# EAGLE board PEGMARev0 (EAGLE 6.2), part 1 of 3
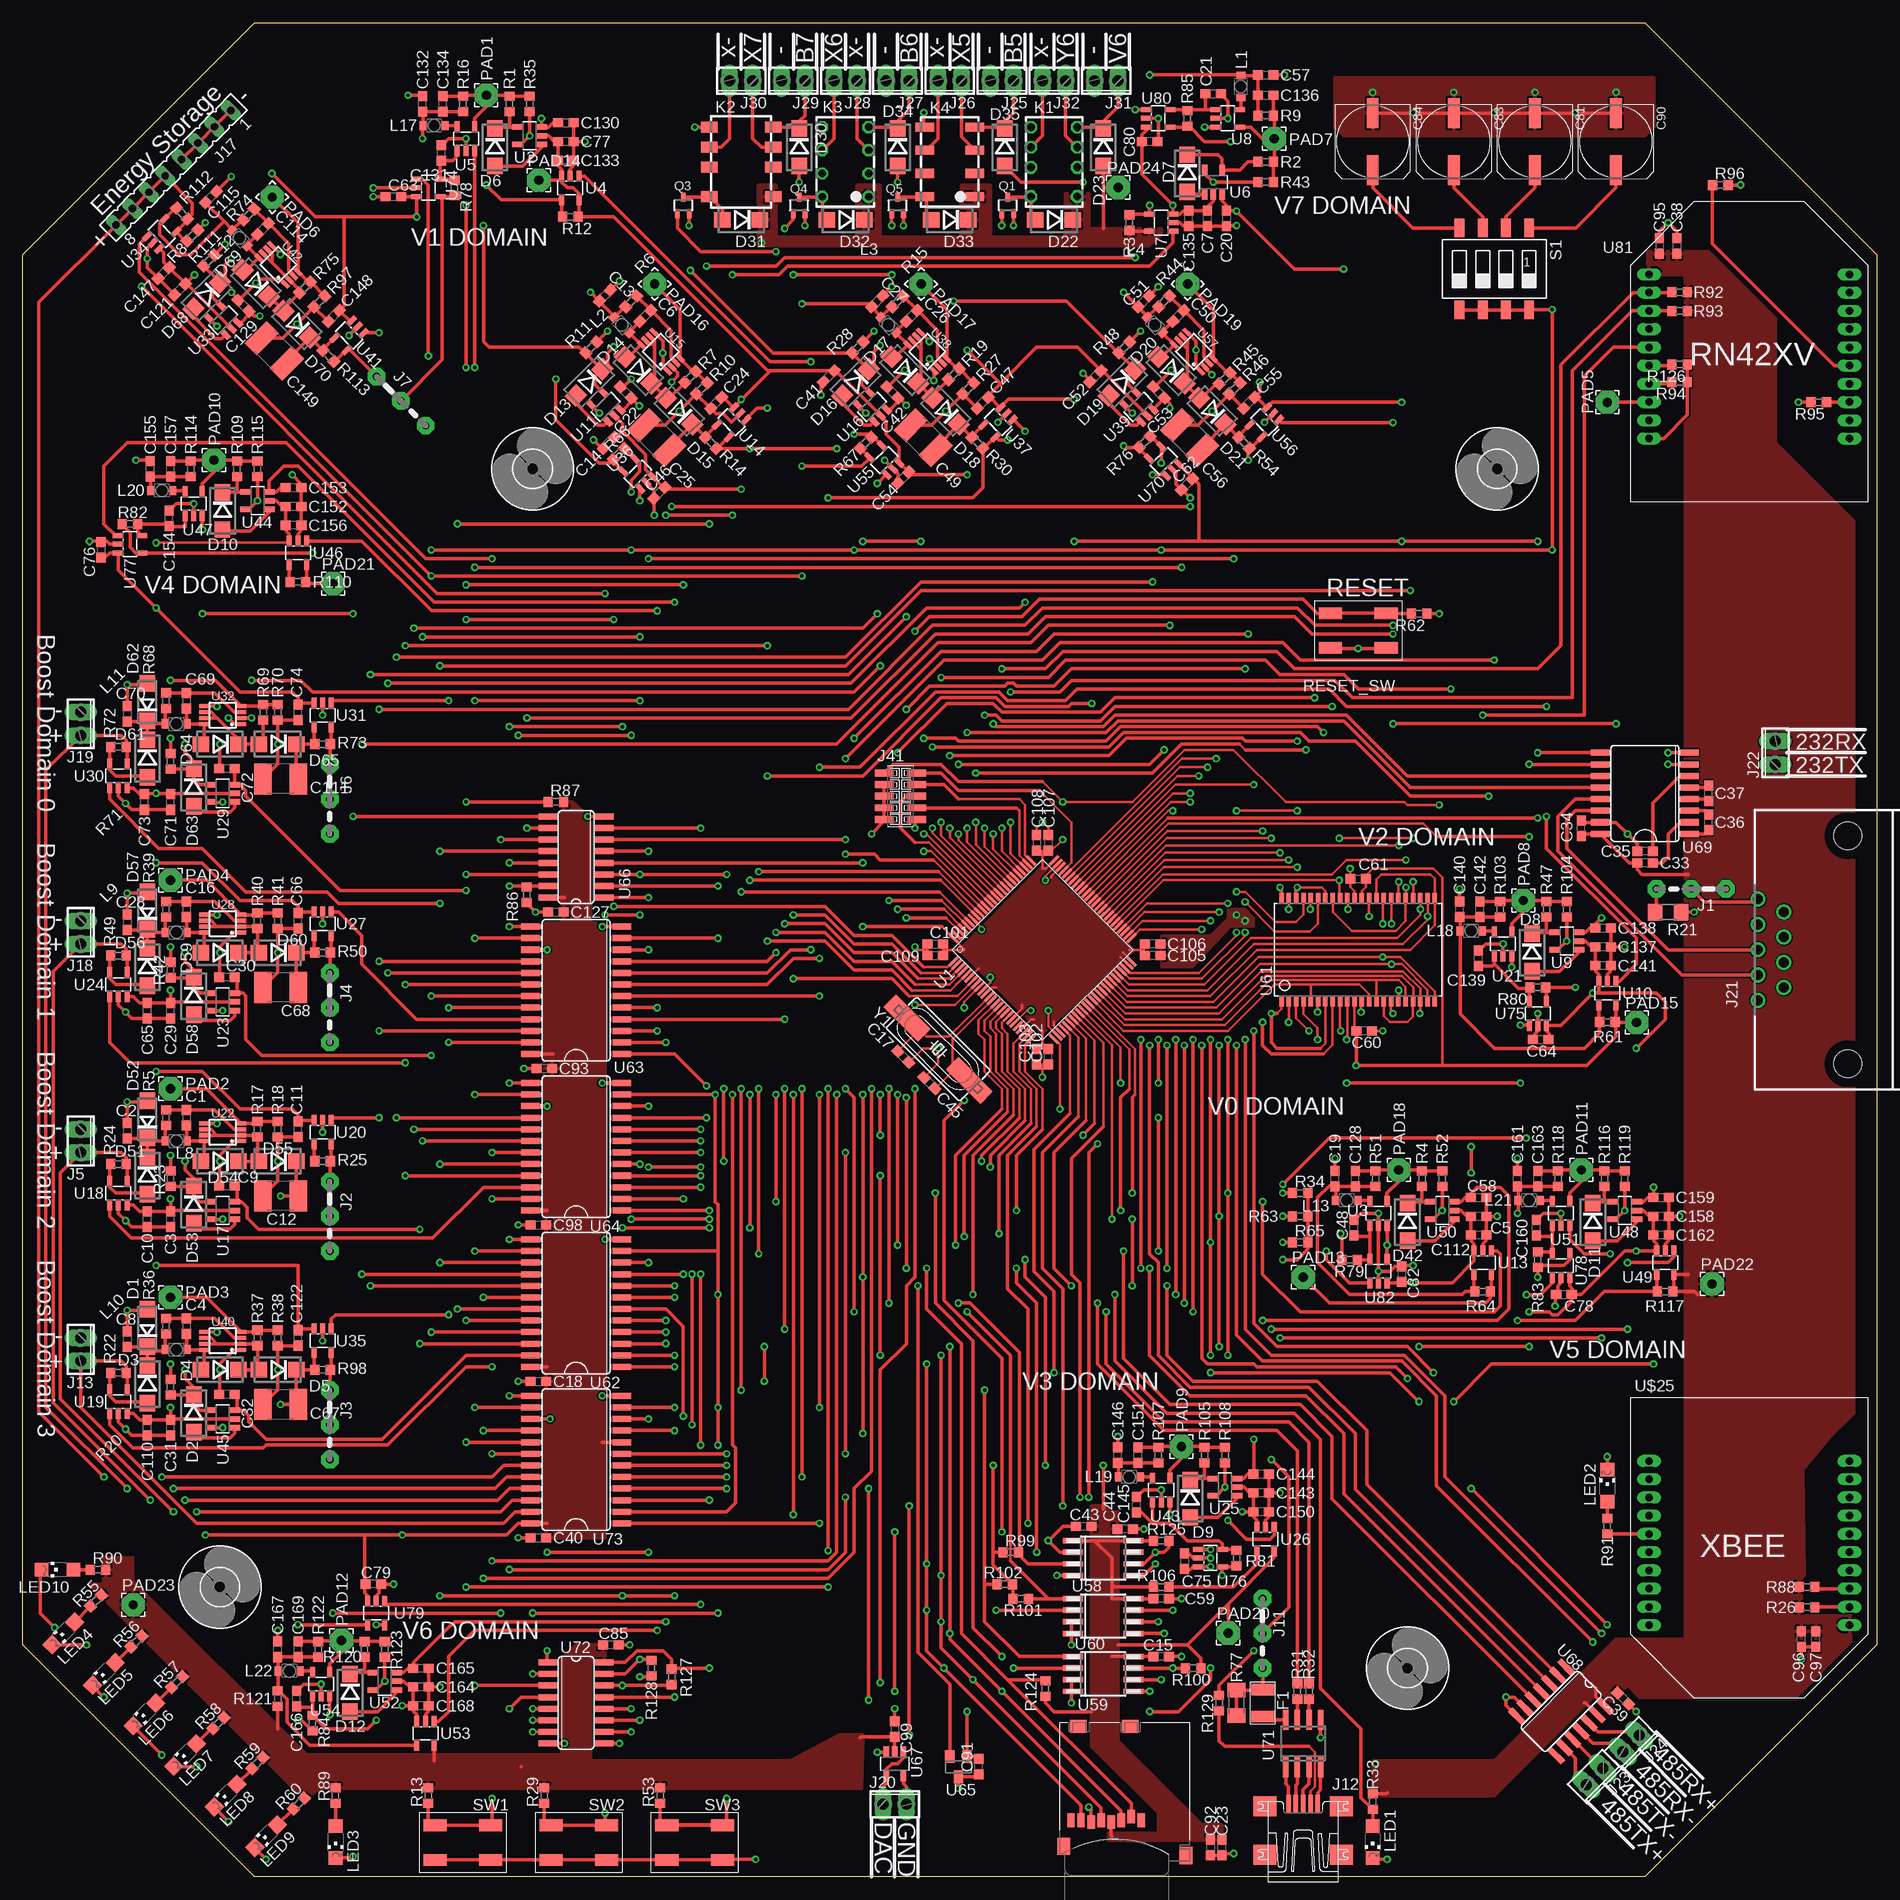
[diagram p0: board, top side]
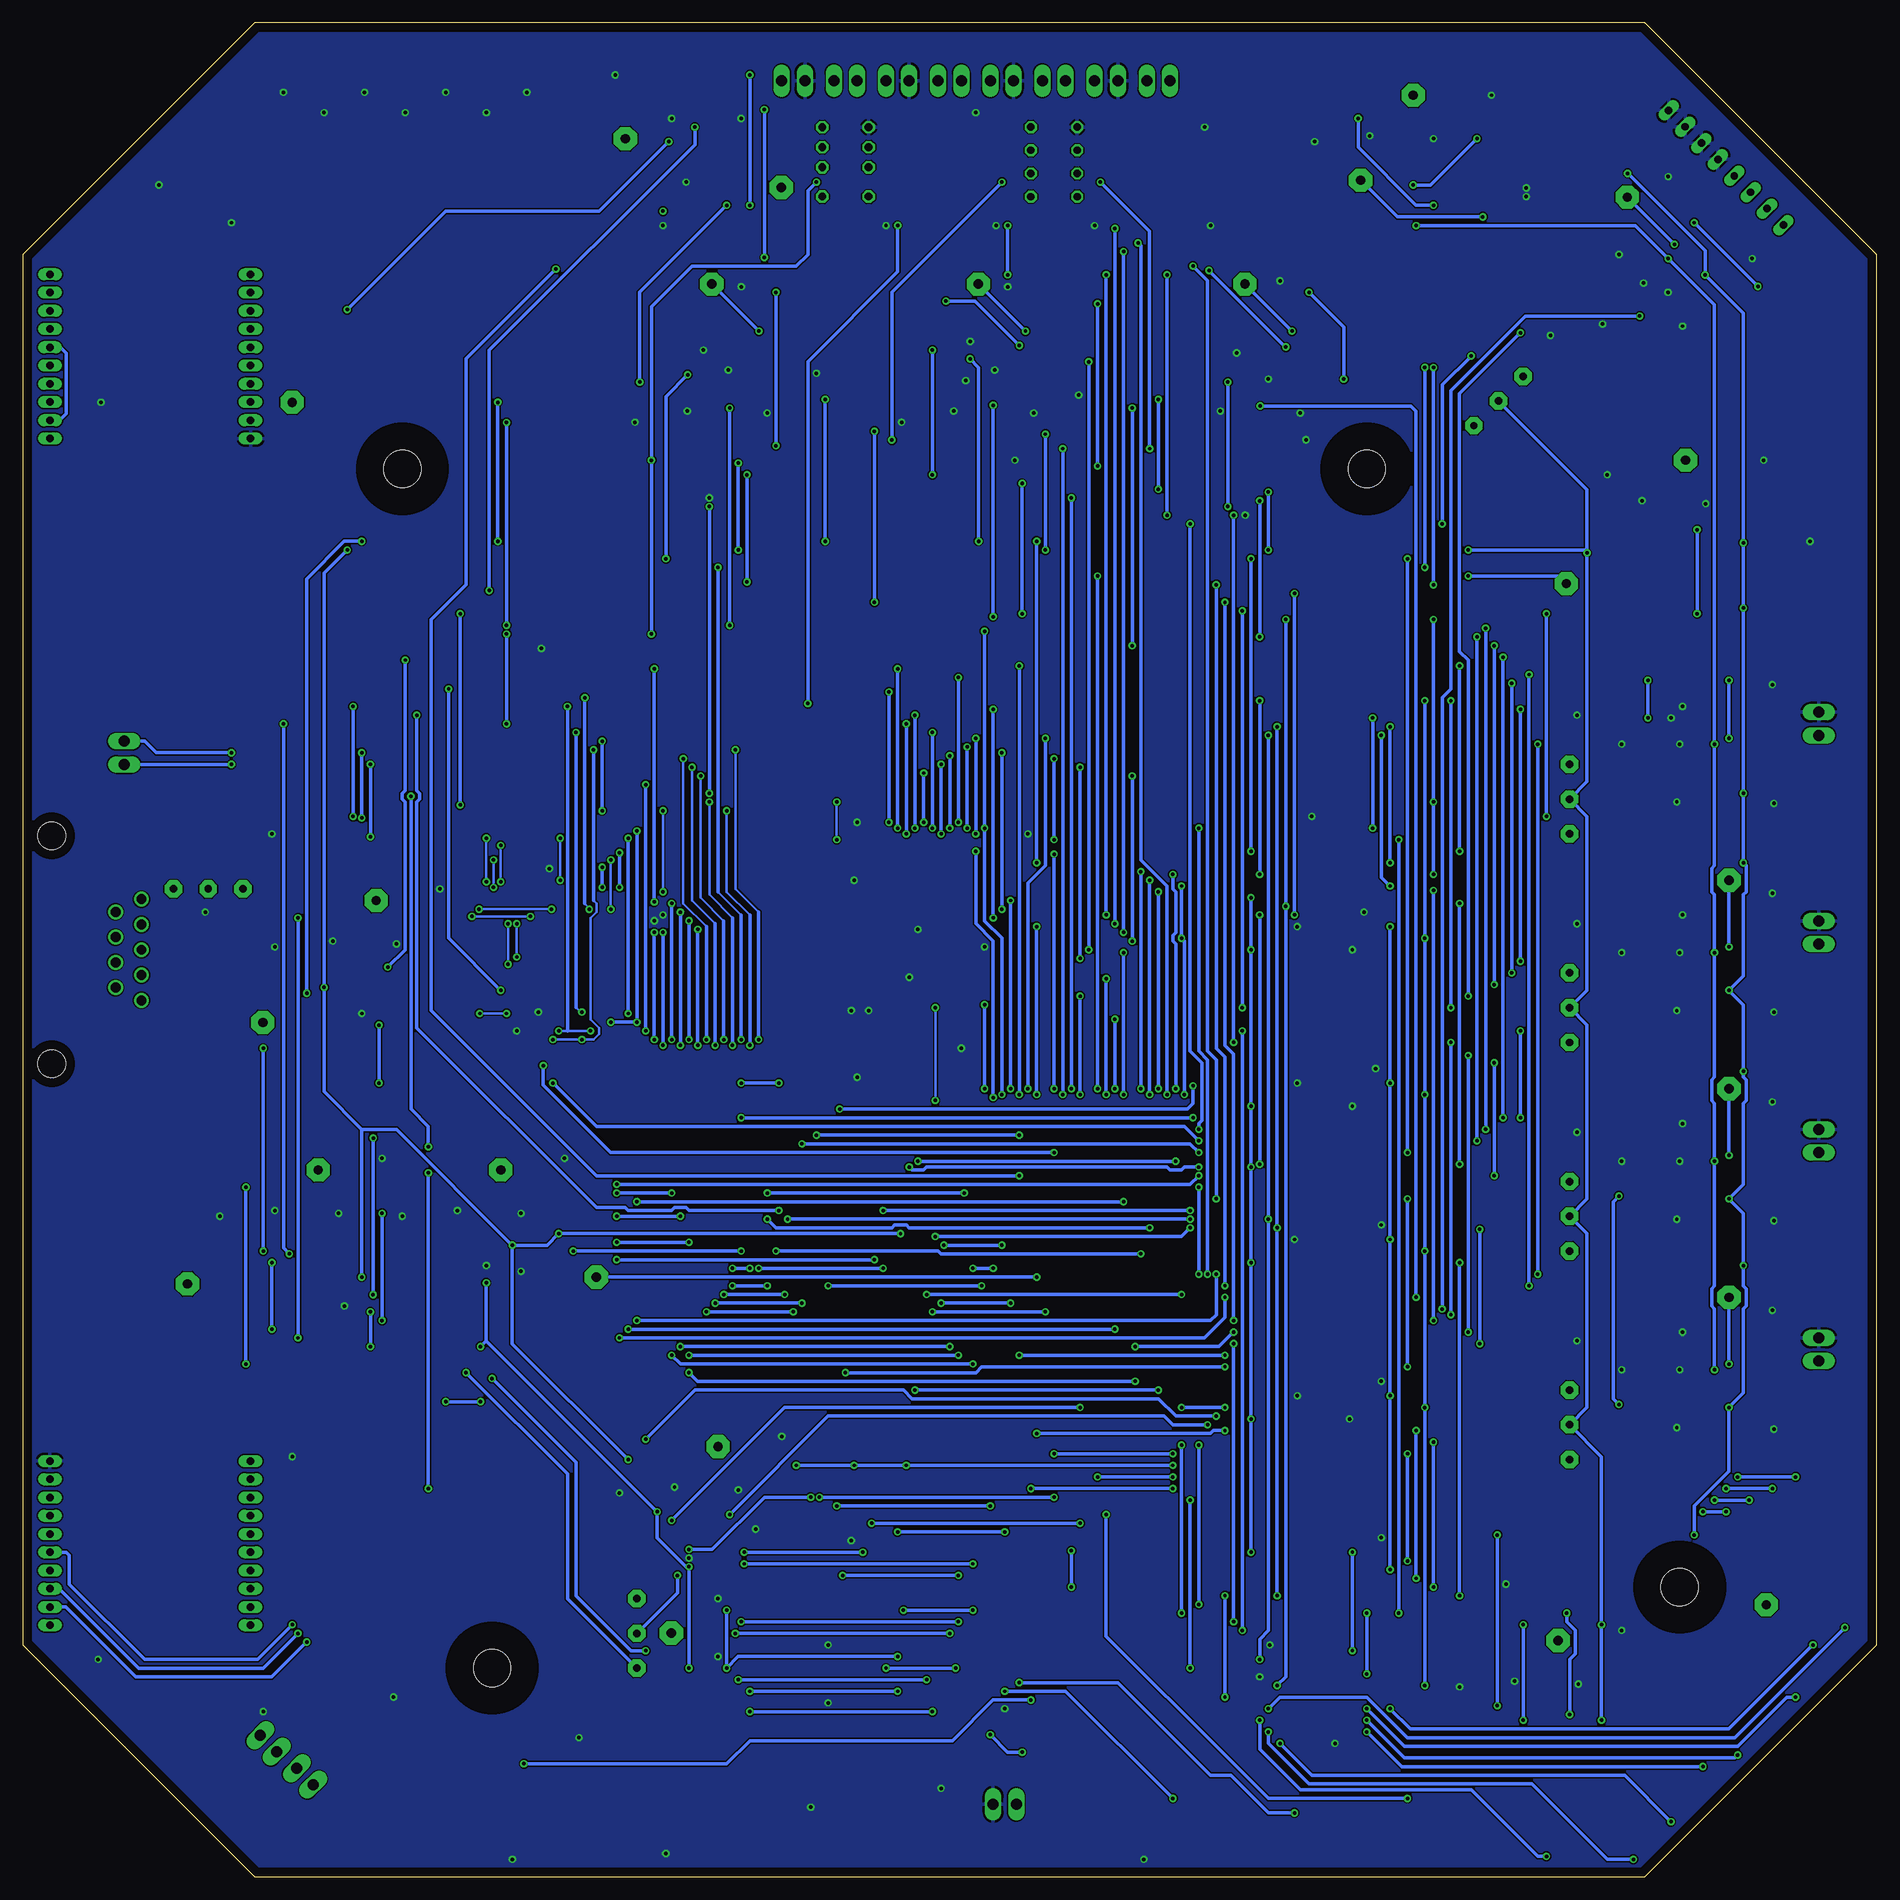
[diagram p1: board, bottom side, seen from below]

Size 203.2 x 203.2 mm. Coordinates in mm from the lower left corner, seen from the top.
Outline: 25.4,0 0,25.4 0,177.8 25.4,203.2 177.8,203.2 203.2,177.8 203.2,25.4 177.8,0 25.4,0
Copper layers (1*16): Top 0.035mm / dielectric 1.5mm / Bottom 0.035mm
Design rules: minimum track width 10mil, minimum drill 15mil, track to track 6mil, track to pad 6mil, pad to pad 6mil, via to via 6mil, smd to smd 6mil, copper to edge 40mil, drill to drill 8mil, minimum pad ring 10mil, minimum via ring 8mil, stop-mask expansion 4mil, vias tented up to drill 0mil, thermal gap 10mil

## Footprints (pad centres in the part's own frame; a part is rotated, then mirrored left to right if it is on the bottom)
C0603 = smd 1.1 x 1: 1 -0.85,0; 2 0.85,0
C1812 = smd 1.9 x 3.4: 1 -1.95,0; 2 1.95,0
UD-8X10_NICHICON = smd 3.3 x 1.3: + 3.125,0; - -3.125,0
DO214AC = smd 1.8 x 1.7: A 2.05,0; C -2.05,0
DO214BA = smd 1.8 x 1.7: A 2.05,0; C -2.05,0
FUSE(1210) = smd 1.27 x 2.54: P$1 -1.483,0.03; P$2 1.517,0.03
04C = drill 0.813 pad 1.905 octagon: 1 -1.905,0; 2 1.905,0; 3 5.715,0
2POL254 = drill 1.2 long: 1 -1.27,0; 2 1.27,0
UX60A-MB-5ST = smd 2 x 0.5: 1 2.25,1.6; 2 2.25,0.8; 3 2.25,0; 4 2.25,-0.8; 5 2.25,-1.6 | smd 2.2 x 2.5: M1 -3.3,-4.2; M2 -3.3,4.2; M3 2,4.2; M4 2,-4.2
FE08 = drill 0.813 long: 1 -8.89,0; 2 -6.35,0; 3 -3.81,0; 4 -1.27,0; 5 1.27,0; 6 3.81,0; 7 6.35,0; 8 8.89,0
H2M09RA = drill 1.092: 1 -5.537,7.925; 2 -2.769,7.925; 3 0,7.925; 4 2.769,7.925; 5 5.537,7.925; 6 -4.153,5.08; 7 -1.384,5.08; 8 1.384,5.08; 9 4.153,5.08 | hole 3.048: -12.497,-1.905; 12.497,-1.905
1296-10 = smd 0.76 x 2.05: 1 -2.54,-1.78; 2 -2.54,1.78; 3 -1.27,-1.78; 4 -1.27,1.78; 5 0,-1.78; 6 0,1.78; 7 1.27,-1.78; 8 1.27,1.78; 9 2.54,-1.78; 10 2.54,1.78
G6KU-2P-Y = drill 0.85 octagon: 1 -3.8,-2.54; 2 -0.6,-2.54; 3 1.6,-2.54; 4 3.8,-2.54; 5 3.8,2.54; 6 1.6,2.54; 7 -0.6,2.54; 8 -3.8,2.54
G6KU-2F-Y = smd 1.2 x 1.8: 1 -3.8,-3.5; 2 -0.6,-3.5; 3 1.6,-3.5; 4 3.8,-3.5; 5 3.8,3.5; 6 1.6,3.5; 7 -0.6,3.5; 8 -3.8,3.5
G6K-2P = drill 0.8 octagon: 1 -2.54,-2.54; 2 0,-2.54; 3 2.54,-2.54; 4 5.08,-2.54; 5 5.08,2.54; 6 2.54,2.54; 7 0,2.54; 8 -2.54,2.54
G6K-2G = smd 1 x 2: 1 -3.81,-2.75; 2 -1.27,-2.75; 3 1.27,-2.75; 4 3.81,-2.75; 5 3.81,2.75; 6 1.27,2.75; 7 -1.27,2.75; 8 -3.81,2.75
L1008/2520METRIC = smd 0.8 x 1: 1 -1.2,0; 2 1.2,0
CHIPLED_1206 = smd 1.5 x 1.5: A 0,-1.75; C 0,1.75
2,54/1,0 = drill 1.016 pad 2.54 octagon: 1 0,0
SOT323 = smd 0.5 x 1: 1 0,0.9; 2 -0.65,-0.9; 3 0.65,-0.9
R0603 = smd 1 x 1.1: 1 -0.85,0; 2 0.85,0
R1206 = smd 1.6 x 1.803: 1 -1.422,0; 2 1.422,0
M1206 = smd 1.6 x 2: 1 -1.4,0; 2 1.4,0
SWITCH(B3SN) = smd 2.54 x 1.27: 1 -3.071,-1.97; 2 3.029,-1.97; 3 3.029,1.83; 4 -3.071,1.83
SMS-004 = smd 1.092 x 2.007: 1 -3.81,-4.496; 2 -1.27,-4.496; 3 1.27,-4.496; 4 3.81,-4.496; 5 3.81,4.496; 6 1.27,4.496; 7 -1.27,4.496; 8 -3.81,4.496
PZ100 = smd 1.4 x 0.3: 1 -7.8,6; 2 -7.8,5.5; 3 -7.8,5; 4 -7.8,4.5; 5 -7.8,4; 6 -7.8,3.5; 7 -7.8,3; 8 -7.8,2.5; 9 -7.8,2; 10 -7.8,1.5; 11 -7.8,1; 12 -7.8,0.5; 13 -7.8,0; 14 -7.8,-0.5; 15 -7.8,-1; 16 -7.8,-1.5; 17 -7.8,-2; 18 -7.8,-2.5; 19 -7.8,-3; 20 -7.8,-3.5; 21 -7.8,-4; 22 -7.8,-4.5; 23 -7.8,-5; 24 -7.8,-5.5; 25 -7.8,-6; 51 7.8,-6; 52 7.8,-5.5; 53 7.8,-5; 54 7.8,-4.5; 55 7.8,-4; 56 7.8,-3.5; 57 7.8,-3; 58 7.8,-2.5; 59 7.8,-2; 60 7.8,-1.5; 61 7.8,-1; 62 7.8,-0.5; 63 7.8,0; 64 7.8,0.5; 65 7.8,1; 66 7.8,1.5; 67 7.8,2; 68 7.8,2.5; 69 7.8,3; 70 7.8,3.5; 71 7.8,4; 72 7.8,4.5; 73 7.8,5; 74 7.8,5.5; 75 7.8,6 | smd 0.3 x 1.4: 26 -6,-7.8; 27 -5.5,-7.8; 28 -5,-7.8; 29 -4.5,-7.8; 30 -4,-7.8; 31 -3.5,-7.8; 32 -3,-7.8; 33 -2.5,-7.8; 34 -2,-7.8; 35 -1.5,-7.8; 36 -1,-7.8; 37 -0.5,-7.8; 38 0,-7.8; 39 0.5,-7.8; 40 1,-7.8; 41 1.5,-7.8; 42 2,-7.8; 43 2.5,-7.8; 44 3,-7.8; 45 3.5,-7.8; 46 4,-7.8; 47 4.5,-7.8; 48 5,-7.8; 49 5.5,-7.8; 50 6,-7.8; 76 6,7.8; 77 5.5,7.8; 78 5,7.8; 79 4.5,7.8; 80 4,7.8; 81 3.5,7.8; 82 3,7.8; 83 2.5,7.8; 84 2,7.8; 85 1.5,7.8; 86 1,7.8; 87 0.5,7.8; 88 0,7.8; 89 -0.5,7.8; 90 -1,7.8; 91 -1.5,7.8; 92 -2,7.8; 93 -2.5,7.8; 94 -3,7.8; 95 -3.5,7.8; 96 -4,7.8; 97 -4.5,7.8; 98 -5,7.8; 99 -5.5,7.8; 100 -6,7.8
SOT23-5 = smd 0.6 x 1.2: 1 -0.95,-1.306; 2 0,-1.306; 3 0.95,-1.306; 4 0.95,1.306; 5 -0.95,1.306
SOT23-5' = smd 0.55 x 1.2: 1 -0.95,-1.3; 2 0,-1.3; 3 0.95,-1.3; 4 0.95,1.3; 5 -0.95,1.3
MICROSD = smd 0.8 x 1.5: 1 -1.94,2.7; 2 -0.84,2.3; 3 0.26,2.7; 4 1.36,2.9; 5 2.46,2.7; 6 3.56,2.9; 7 4.66,2.7; 8 5.76,2.7 | smd 1.4 x 1.9: NC -6.85,6.55; NC3 6.55,5.55 | smd 1.8 x 1.4: NC1 -0.75,-7.6; NC2 4.95,-7.6
MSOP8 = smd 0.45 x 1: 1 -0.975,-2.05; 2 -0.325,-2.05; 3 0.325,-2.05; 4 0.975,-2.05; 5 0.975,2.05; 6 0.325,2.05; 7 -0.325,2.05; 8 -0.975,2.05
SO-08M = smd 0.6 x 2.2: 1 -1.905,-3.33; 2 -0.635,-3.33; 3 0.635,-3.33; 4 1.905,-3.33; 5 1.905,3.33; 6 0.635,3.33; 7 -0.635,3.33; 8 -1.905,3.33
TSOPII-Z44 = smd 0.5 x 1.2: 1 -8.4,-5.627; 2 -7.6,-5.627; 3 -6.8,-5.627; 4 -6,-5.627; 5 -5.2,-5.627; 6 -4.4,-5.627; 7 -3.6,-5.627; 8 -2.8,-5.627; 9 -2,-5.627; 10 -1.2,-5.627; 11 -0.4,-5.627; 12 0.4,-5.627; 13 1.2,-5.627; 14 2,-5.627; 15 2.8,-5.627; 16 3.6,-5.627; 17 4.4,-5.627; 18 5.2,-5.627; 19 6,-5.627; 20 6.8,-5.627; 21 7.6,-5.627; 22 8.4,-5.627; 23 8.4,5.627; 24 7.6,5.627; 25 6.8,5.627; 26 6,5.627; 27 5.2,5.627; 28 4.4,5.627; 29 3.6,5.627; 30 2.8,5.627; 31 2,5.627; 32 1.2,5.627; 33 0.4,5.627; 34 -0.4,5.627; 35 -1.2,5.627; 36 -2,5.627; 37 -2.8,5.627; 38 -3.6,5.627; 39 -4.4,5.627; 40 -5.2,5.627; 41 -6,5.627; 42 -6.8,5.627; 43 -7.6,5.627; 44 -8.4,5.627
SO24W = smd 0.66 x 2.032: 1 -6.985,-5.029; 2 -5.715,-5.029; 3 -4.445,-5.029; 4 -3.175,-5.029; 5 -1.905,-5.029; 6 -0.635,-5.029; 7 0.635,-5.029; 8 1.905,-5.029; 9 3.175,-5.029; 10 4.445,-5.029; 11 5.715,-5.029; 12 6.985,-5.029; 13 6.985,5.029; 14 5.715,5.029; 15 4.445,5.029; 16 3.175,5.029; 17 1.905,5.029; 18 0.635,5.029; 19 -0.635,5.029; 20 -1.905,5.029; 21 -3.175,5.029; 22 -4.445,5.029; 23 -5.715,5.029; 24 -6.985,5.029
SOT23 = smd 1 x 1.4: 1 -0.95,-1.1; 2 0.95,-1.1; 3 0,1.1
SO16 = smd 0.66 x 2.032: 1 -4.445,-3.073; 2 -3.175,-3.073; 3 -1.905,-3.073; 4 -0.635,-3.073; 5 0.635,-3.073; 6 1.905,-3.073; 7 3.175,-3.073; 8 4.445,-3.073; 9 4.445,3.073; 10 3.175,3.073; 11 1.905,3.073; 12 0.635,3.073; 13 -0.635,3.073; 14 -1.905,3.073; 15 -3.175,3.073; 16 -4.445,3.073
SO14 = smd 0.66 x 2.032: 1 -3.81,-3.073; 2 -2.54,-3.073; 3 -1.27,-3.073; 4 0,-3.073; 5 1.27,-3.073; 6 2.54,-3.073; 7 3.81,-3.073; 8 3.81,3.073; 9 2.54,3.073; 10 1.27,3.073; 11 0,3.073; 12 -1.27,3.073; 13 -2.54,3.073; 14 -3.81,3.073
SO16L = smd 0.66 x 2.032: 1 -4.445,-4.902; 2 -3.175,-4.902; 3 -1.905,-4.902; 4 -0.635,-4.902; 5 0.635,-4.902; 6 1.905,-4.902; 7 3.175,-4.902; 8 4.445,-4.902; 9 4.445,4.902; 10 3.175,4.902; 11 1.905,4.902; 12 0.635,4.902; 13 -0.635,4.902; 14 -1.905,4.902; 15 -3.175,4.902; 16 -4.445,4.902
SO08 = smd 0.6 x 2.2: 1 -1.905,-2.6; 2 -0.635,-2.6; 3 0.635,-2.6; 4 1.905,-2.6; 5 1.905,2.6; 6 0.635,2.6; 7 -0.635,2.6; 8 -1.905,2.6
RN42XV = drill 0.813 long: 1 -11,9.27; 2 -11,7.27; 3 -11,5.27; 4 -11,3.27; 5 -11,1.27; 6 -11,-0.73; 7 -11,-2.73; 8 -11,-4.73; 9 -11,-6.73; 10 -11,-8.73; 11 11,-8.73; 12 11,-6.73; 13 11,-4.73; 14 11,-2.73; 15 11,-0.73; 16 11,1.27; 17 11,3.27; 18 11,5.27; 19 11,7.27; 20 11,9.27
4,1 = hole 4.1: 0,0
XBEE = drill 0.813 long: 1 -11,8; 2 -11,6; 3 -11,4; 4 -11,2; 5 -11,0; 6 -11,-2; 7 -11,-4; 8 -11,-6; 9 -11,-8; 10 -11,-10; 11 11,-10; 12 11,-8; 13 11,-6; 14 11,-4; 15 11,-2; 16 11,0; 17 11,2; 18 11,4; 19 11,6; 20 11,8
HC49UP = smd 5.334 x 1.93: 1 -4.826,0; 2 4.826,0

## Placement (x,y rotation side)
C1  4.7pF  [C0603]  17.94,83.19 270 top
C2  22uF  [C0603]  11.43,81.76 270 top
C3  .1uF  [C0603]  16.19,72.07 90 top
C4  4.7pF  [C0603]  17.94,60.33 270 top
C5  .1uF  [C0603]  159.54,72.39 180 top
C6  4.7pF  [C0603]  68.24,171.09 225 top
C7  .1uF  [C0603]  129.86,181.77 90 top
C8  22uF  [C0603]  11.43,58.9 270 top
C9  10uF  [C0603]  22.38,75.72 180 top
C10  .1uF  [C0603]  13.65,72.07 90 top
C11  .1uF  [C0603]  30.16,81.92 90 top
C12  100uF Tantalum  [C1812]  28.26,74.61 180 top
C13  22uF  [C0603]  63.79,173.3 225 top
C14  .1uF  [C0603]  64.23,157.16 45 top
C15  .1uF  [C0603]  124.78,24.13 180 top
C16  4.7pF  [C0603]  17.94,106.05 270 top
C17  16pF  [C0603]  96.52,89.85 135 top
C18  .1uF  [C0603]  56.52,54.29 0 top
C19  10uF  [C0603]  143.83,76.52 90 top
C20  10uF  [C0603]  131.92,181.77 270 top
C21  4.7uF  [C0603]  130.49,195.42 0 top
C22  10uF  [C0603]  66.11,162.67 135 top
C23  10uF  [C0603]  131.44,3.17 90 top
C24  .1uF  [C0603]  75.99,161.55 45 top
C25  100uF Tantalum  [C1812]  69.48,157.73 135 top
C26  4.7pF  [C0603]  97.45,171.09 225 top
C27  22uF  [C0603]  93.63,172.66 225 top
C28  22uF  [C0603]  11.43,104.62 270 top
C29  .1uF  [C0603]  16.19,94.93 90 top
C30  10uF  [C0603]  22.38,98.58 180 top
C31  .1uF  [C0603]  16.19,49.21 90 top
C32  10uF  [C0603]  22.38,52.86 180 top
C33  .1uF  [C0603]  177.8,111.12 180 top
C34  .1uF  [C0603]  170.81,114.94 90 top
C35  .1uF  [C0603]  177.8,112.39 180 top
C36  .1uF  [C0603]  184.78,115.57 90 top
C37  .1uF  [C0603]  184.78,118.75 90 top
C38  .1uF  [C0603]  181.29,178.75 270 top
C39  .1uF  [C0603]  175.42,19.53 315 top
C40  .1uF  [C0603]  56.52,37.15 0 top
C41  .1uF  [C0603]  88.36,164.47 45 top
C42  10uF  [C0603]  95.32,162.67 135 top
C43  .22uF  [C0603]  116.28,38.42 0 top
C44  .1uF  [C0603]  120.81,38.1 180 top
C45  16pF  [C0603]  99.38,87 135 top
C46  .1uF  [C0603]  69.76,151.67 45 top
C47  .1uF  [C0603]  105.2,161.55 45 top
C48  4.7uF  [C0603]  145.89,71.12 90 top
C49  100uF Tantalum  [C1812]  98.69,157.73 135 top
C50  4.7pF  [C0603]  126.66,171.09 225 top
C51  22uF  [C0603]  122.84,172.66 225 top
C52  .1uF  [C0603]  117.57,164.47 45 top
C53  10uF  [C0603]  124.53,162.67 135 top
C54  .1uF  [C0603]  96.52,153.35 45 top
C55  .1uF  [C0603]  134.41,161.55 45 top
C56  100uF Tantalum  [C1812]  127.9,157.73 135 top
C57  10uF  [C0603]  136.21,197.49 0 top
C58  10uF  [C0603]  159.54,74.45 0 top
C59  .1uF  [C0603]  124.78,30.48 180 top
C60  .1uF  [C0603]  147,92.71 180 top
C61  .1uF  [C0603]  146.37,109.38 0 top
C62  .1uF  [C0603]  127.6,152.62 45 top
C63  .1uF  [C0603]  40.64,184.15 0 top
C64  .1uF  [C0603]  166.37,91.76 0 top
C65  .1uF  [C0603]  13.65,94.93 90 top
C66  .1uF  [C0603]  30.16,104.78 90 top
C67  100uF Tantalum  [C1812]  28.26,51.75 180 top
C68  100uF Tantalum  [C1812]  28.26,97.47 180 top
C69  4.7pF  [C0603]  17.94,128.91 270 top
C70  22uF  [C0603]  11.43,127.48 270 top
C71  .1uF  [C0603]  16.19,117.79 90 top
C72  10uF  [C0603]  22.38,121.44 180 top
C73  .1uF  [C0603]  13.34,117.79 90 top
C74  .1uF  [C0603]  30.16,127.64 90 top
C75  .1uF  [C0603]  127.32,34.61 270 top
C76  .1uF  [C0603]  8.57,145.41 270 top
C77  .1uF  [C0603]  59.53,190.18 180 top
C78  .1uF  [C0603]  168.91,63.82 0 top
C79  .1uF  [C0603]  38.42,32.07 180 top
C80  .1uF  [C0603]  123.51,190.18 180 top
C81  220uF  [UD-8X10_NICHICON]  165.74,190.18 270 top
C82  .1uF  [C0603]  151.13,66.04 270 top
C83  220uF  [UD-8X10_NICHICON]  156.84,190.18 270 top
C84  220uF  [UD-8X10_NICHICON]  147.96,190.18 270 top
C85  .1uF  [C0603]  64.45,25.4 180 top
C90  220uF  [UD-8X10_NICHICON]  174.62,190.18 270 top
C91  .1uF  [C0603]  104.78,12.06 90 top
C92  .1uF  [C0603]  130.18,3.17 270 top
C93  .1uF  [C0603]  57.15,88.58 0 top
C95  10uF  [C0603]  179.39,178.75 270 top
C96  .1uF  [C0603]  194.94,26.04 90 top
C97  10uF  [C0603]  196.53,26.04 90 top
C98  .1uF  [C0603]  56.52,71.44 0 top
C99  .1uF  [C0603]  95.57,16.19 270 top
C101  .1uF  [C0603]  100.01,102.23 0 top
C102  .1uF  [C0603]  112.39,89.85 90 top
C103  .1uF  [C0603]  111.12,89.85 90 top
C105  .1uF  [C0603]  123.83,100.97 180 top
C106  .1uF  [C0603]  123.83,102.23 180 top
C107  .1uF  [C0603]  112.39,113.35 270 top
C108  .1uF  [C0603]  111.12,113.35 270 top
C109  .1uF  [C0603]  100.01,100.97 0 top
C110  .1uF  [C0603]  13.65,49.21 90 top
C111  100uF Tantalum  [C1812]  28.26,120.33 180 top
C112  .1uF  [C0603]  159.54,70.33 180 top
C114  4.7pF  [C0603]  26.33,180.61 225 top
C115  22uF  [C0603]  20.61,184.09 225 top
C121  .1uF  [C0603]  17.24,173.99 45 top
C122  .1uF  [C0603]  30.16,59.05 90 top
C127  .1uF  [C0603]  58.42,105.73 0 top
C128  33pF  [C0603]  146.05,76.52 90 top
C129  10uF  [C0603]  24.2,172.19 135 top
C130  10uF  [C0603]  59.53,192.25 0 top
C131  4.7uF  [C0603]  45.88,188.91 90 top
C132  10uF  [C0603]  43.81,194.31 90 top
C133  .1uF  [C0603]  59.53,188.12 180 top
C134  33pF  [C0603]  46.04,194.31 90 top
C135  .1uF  [C0603]  127.79,181.77 90 top
C136  33pF  [C0603]  136.21,195.26 0 top
C137  .1uF  [C0603]  173.2,101.92 180 top
C138  10uF  [C0603]  173.2,103.98 0 top
C139  4.7uF  [C0603]  159.54,100.65 90 top
C140  10uF  [C0603]  157.48,106.05 90 top
C141  .1uF  [C0603]  173.2,99.85 180 top
C142  33pF  [C0603]  159.7,106.05 90 top
C143  .1uF  [C0603]  135.73,42.07 180 top
C144  10uF  [C0603]  135.73,44.13 0 top
C145  4.7uF  [C0603]  122.08,40.8 90 top
C146  10uF  [C0603]  120.02,46.2 90 top
C147  .1uF  [C0603]  15.44,175.79 45 top
C148  .1uF  [C0603]  34.08,171.07 45 top
C149  100uF Tantalum  [C1812]  27.57,167.25 135 top
C150  .1uF  [C0603]  135.73,40.01 180 top
C151  33pF  [C0603]  122.24,46.2 90 top
C152  .1uF  [C0603]  29.69,150.18 180 top
C153  10uF  [C0603]  29.69,152.24 0 top
C154  4.7uF  [C0603]  16.03,148.91 90 top
C155  10uF  [C0603]  13.97,154.31 90 top
C156  .1uF  [C0603]  29.69,148.11 180 top
C157  33pF  [C0603]  16.19,154.31 90 top
C158  .1uF  [C0603]  179.55,72.39 180 top
C159  10uF  [C0603]  179.55,74.45 0 top
C160  4.7uF  [C0603]  165.89,71.12 90 top
C161  10uF  [C0603]  163.83,76.52 90 top
C162  .1uF  [C0603]  179.55,70.33 180 top
C163  33pF  [C0603]  166.05,76.52 90 top
C164  .1uF  [C0603]  43.66,20.8 180 top
C165  10uF  [C0603]  43.66,22.86 0 top
C166  4.7uF  [C0603]  30,19.53 90 top
C167  10uF  [C0603]  27.94,24.92 90 top
C168  .1uF  [C0603]  43.66,18.73 180 top
C169  33pF  [C0603]  30.16,24.92 90 top
D1  TPSMA11HE3  [DO214AC]  13.65,60.17 90 top
D2  LSM115JE3  [DO214BA]  18.73,50.8 270 top
D3  LSM115JE3  [DO214BA]  13.65,53.98 270 top
D4  LSM115JE3  [DO214BA]  21.59,55.56 180 top
D5  LSM115JE3  [DO214BA]  27.94,55.56 180 top
D6  LSM115JE3  [DO214BA]  51.75,189.55 270 top
D7  LSM115JE3  [DO214BA]  127.64,186.69 270 top
D8  LSM115JE3  [DO214BA]  165.42,101.28 270 top
D9  LSM115JE3  [DO214BA]  127.95,41.43 270 top
D10  LSM115JE3  [DO214BA]  21.91,149.7 270 top
D11  LSM115JE3  [DO214BA]  172.09,71.75 270 top
D12  LSM115JE3  [DO214BA]  35.88,20.16 270 top
D13  LSM115JE3  [DO214BA]  62.07,163.79 225 top
D14  LSM115JE3  [DO214BA]  67.46,165.14 135 top
D15  LSM115JE3  [DO214BA]  71.95,160.65 135 top
D16  LSM115JE3  [DO214BA]  91.28,163.79 225 top
D17  LSM115JE3  [DO214BA]  96.67,165.14 135 top
D18  LSM115JE3  [DO214BA]  101.16,160.65 135 top
D19  LSM115JE3  [DO214BA]  120.49,163.79 225 top
D20  LSM115JE3  [DO214BA]  125.88,165.14 135 top
D21  LSM115JE3  [DO214BA]  130.37,160.65 135 top
D22  LSM115JE3  [DO214BA]  113.03,181.61 180 top
D23  LSM115JE3  [DO214BA]  118.43,189.55 270 top
D30  LSM115JE3  [DO214BA]  85.09,189.55 270 top
D31  LSM115JE3  [DO214BA]  78.74,181.61 180 top
D32  LSM115JE3  [DO214BA]  90.17,181.61 180 top
D33  LSM115JE3  [DO214BA]  101.6,181.61 180 top
D34  LSM115JE3  [DO214BA]  95.89,189.55 270 top
D35  LSM115JE3  [DO214BA]  107.63,189.55 270 top
D42  LSM115JE3  [DO214BA]  151.76,71.75 270 top
D51  LSM115JE3  [DO214BA]  13.65,76.83 270 top
D52  TPSMA11HE3  [DO214AC]  13.65,83.03 90 top
D53  LSM115JE3  [DO214BA]  18.73,73.66 270 top
D54  LSM115JE3  [DO214BA]  21.59,78.42 180 top
D55  LSM115JE3  [DO214BA]  27.94,78.42 180 top
D56  LSM115JE3  [DO214BA]  13.65,99.69 270 top
D57  TPSMA11HE3  [DO214AC]  13.65,105.89 90 top
D58  LSM115JE3  [DO214BA]  18.73,96.52 270 top
D59  LSM115JE3  [DO214BA]  21.59,101.28 180 top
D60  LSM115JE3  [DO214BA]  27.94,101.28 180 top
D61  LSM115JE3  [DO214BA]  13.65,122.56 270 top
D62  TPSMA11HE3  [DO214AC]  13.65,128.75 90 top
D63  LSM115JE3  [DO214BA]  18.73,119.38 270 top
D64  LSM115JE3  [DO214BA]  21.59,124.14 180 top
D65  LSM115JE3  [DO214BA]  27.94,124.14 180 top
D68  LSM115JE3  [DO214BA]  20.16,173.32 225 top
D69  LSM115JE3  [DO214BA]  25.55,174.66 135 top
D70  LSM115JE3  [DO214BA]  30.04,170.17 135 top
F1  MS-USMF010  [FUSE(1210)]  135.89,19.05 270 top
J1  [04C]  184.78,108.27 180 top
J2  [04C]  33.66,74.3 270 top
J3  [04C]  33.66,51.44 270 top
J4  [04C]  33.66,97.16 270 top
J5  [2POL254]  6.35,80.64 270 top
J6  [04C]  33.66,120.02 270 top
J7  Molex 22-28-4030  [04C]  40.11,163.09 315 top
J11  [04C]  135.89,28.57 270 top
J12  MINI-USB-UX60A-MB-5ST  [UX60A-MB-5ST]  140.34,5.71 90 top
J13  [2POL254]  6.35,57.78 270 top
J17  [FE08]  16.51,187.32 225 top
J18  [2POL254]  6.35,103.5 270 top
J19  [2POL254]  6.35,126.36 270 top
J20  [2POL254]  95.57,7.94 0 top
J21  D-SUB9-H2M09RA  [H2M09RA]  198.12,101.6 90 top
J22  [2POL254]  192.09,123.19 90 top
J23  [2POL254]  172.27,10.98 225 top
J24  [2POL254]  176.27,14.61 225 top
J25  [2POL254]  107.31,196.85 180 top
J26  [2POL254]  101.6,196.85 180 top
J27  [2POL254]  95.89,196.85 180 top
J28  [2POL254]  90.17,196.85 180 top
J29  [2POL254]  84.45,196.85 180 top
J30  [2POL254]  78.74,196.85 180 top
J31  [2POL254]  118.75,196.85 180 top
J32  [2POL254]  113.03,196.85 180 top
J41  FTSH-105-02-F-D  [1296-10]  96.2,118.43 270 top
K1  G6KU-2P-Y  [G6KU-2P-Y]  113.03,187.96 90 top
K2  G6KU-2F-Y  [G6KU-2F-Y]  78.74,187.96 90 top
K3  G6K-2P  [G6K-2P]  90.17,186.69 90 top
K4  G6K-2G  [G6K-2G]  101.6,187.96 90 top
L1  4.7uH  [L1008/2520METRIC]  133.51,196.22 90 top
L2  4.7uH  [L1008/2520METRIC]  65.66,170.08 315 top
L3  4.7uH  [L1008/2520METRIC]  94.87,170.08 315 top
L4  4.7uH  [L1008/2520METRIC]  124.08,170.08 315 top
L8  4.7uH  [L1008/2520METRIC]  16.83,80.64 0 top
L9  4.7uH  [L1008/2520METRIC]  16.83,103.5 0 top
L10  4.7uH  [L1008/2520METRIC]  16.83,57.78 0 top
L11  4.7uH  [L1008/2520METRIC]  16.83,126.36 0 top
L12  4.7uH  [L1008/2520METRIC]  23.75,179.6 315 top
L13  4.7uH  [L1008/2520METRIC]  145.1,74.14 180 top
L17  4.7uH  [L1008/2520METRIC]  45.09,191.93 180 top
L18  4.7uH  [L1008/2520METRIC]  158.75,103.66 180 top
L19  4.7uH  [L1008/2520METRIC]  121.28,43.81 180 top
L20  4.7uH  [L1008/2520METRIC]  15.24,151.92 180 top
L21  4.7uH  [L1008/2520METRIC]  165.1,74.14 180 top
L22  4.7uH  [L1008/2520METRIC]  29.21,22.54 180 top
LED1  [CHIPLED_1206]  147.96,3.81 180 top
LED2  [CHIPLED_1206]  173.67,42.86 0 top
LED3  [CHIPLED_1206]  34.29,3.81 180 top
LED4  [CHIPLED_1206]  4.45,26.67 135 top
LED5  [CHIPLED_1206]  8.89,22.23 135 top
LED6  [CHIPLED_1206]  13.34,17.78 135 top
LED7  [CHIPLED_1206]  17.78,13.34 135 top
LED8  [CHIPLED_1206]  22.23,8.89 135 top
LED9  [CHIPLED_1206]  26.67,4.45 135 top
LED10  [CHIPLED_1206]  3.81,33.66 90 top
PAD1  [2,54/1,0]  50.8,195.26 0 top
PAD2  [2,54/1,0]  16.19,86.36 180 top
PAD3  [2,54/1,0]  16.19,63.5 180 top
PAD4  [2,54/1,0]  16.19,109.22 180 top
PAD5  [2,54/1,0]  173.67,161.61 90 top
PAD6  [2,54/1,0]  27.34,184.09 135 top
PAD7  [2,54/1,0]  137.16,190.5 270 top
PAD8  [2,54/1,0]  164.47,107 0 top
PAD9  [2,54/1,0]  127,47.15 0 top
PAD10  [2,54/1,0]  20.95,155.26 0 top
PAD11  [2,54/1,0]  170.81,77.47 0 top
PAD12  [2,54/1,0]  34.92,25.88 0 top
PAD13  [2,54/1,0]  140.34,65.72 0 top
PAD14  [2,54/1,0]  56.56,185.94 0 top
PAD15  [2,54/1,0]  176.9,93.62 0 top
PAD16  [2,54/1,0]  69.25,174.57 135 top
PAD17  [2,54/1,0]  98.46,174.57 135 top
PAD18  [2,54/1,0]  150.81,77.47 0 top
PAD19  [2,54/1,0]  127.67,174.57 135 top
PAD20  [2,54/1,0]  132.13,26.71 0 top
PAD21  [2,54/1,0]  34.02,141.73 0 top
PAD22  [2,54/1,0]  185.15,64.97 0 top
PAD23  [2,54/1,0]  12.11,29.81 0 top
PAD24  [2,54/1,0]  120.06,185.15 0 top
Q1  2N2222  [SOT323]  107.95,183.2 0 top
Q3  2N2222  [SOT323]  72.39,183.2 0 top
Q4  2N2222  [SOT323]  85.09,183.2 0 top
Q5  2N2222  [SOT323]  95.89,183.2 0 top
R1  144k  [R0603]  53.34,194.31 90 top
R2  144k  [R0603]  136.21,187.96 0 top
R3  .11  [R0603]  121.28,181.29 90 top
R4  144k  [R0603]  153.35,76.52 90 top
R5  150k  [R0603]  15.72,83.19 270 top
R6  150k  [R0603]  66.67,172.66 225 top
R7  180k  [R0603]  73.16,164.37 225 top
R8  30  [R0603]  18.6,179.89 225 top
R9  360k  [R0603]  136.21,193.04 180 top
R10  75k  [R0603]  74.42,163.12 45 top
R11  22k  [R0603]  62.29,167.61 45 top
R12  .263  [R0603]  60.01,181.93 180 top
R13  1K  [R0603]  44.45,8.89 90 top
R14  0.10  [R0603]  75.43,157.17 135 top
R15  150k  [R0603]  95.88,172.66 225 top
R16  360k  [R0603]  48.26,194.31 270 top
R17  125k  [R0603]  25.72,81.92 270 top
R18  75k  [R0603]  27.94,81.92 90 top
R19  180k  [R0603]  102.06,164.69 225 top
R20  60k  [R0603]  16.19,53.66 90 top
R21  120  [R1206]  180.34,105.73 180 top
R22  .033  [R0603]  10.48,55.24 180 top
R23  60k  [R0603]  16.19,76.52 90 top
R24  .044  [R0603]  10.48,78.11 180 top
R25  .044  [R0603]  32.86,78.42 180 top
R26  100k  [R0603]  195.58,29.53 180 top
R27  75k  [R0603]  103.63,163.12 45 top
R28  22k  [R0603]  91.5,167.61 45 top
R29  1K  [R0603]  57.15,8.89 90 top
R30  0.10  [R0603]  104.64,157.17 135 top
R31  22  [R0603]  139.7,20.32 270 top
R32  22  [R0603]  140.97,20.32 270 top
R33  1k  [R0603]  147.96,8.26 270 top
R34  47k  [R0603]  140.02,74.93 0 top
R35  75k  [R0603]  55.56,194.31 90 top
R36  150k  [R0603]  15.72,60.33 270 top
R37  125k  [R0603]  25.72,59.05 270 top
R38  75k  [R0603]  27.94,59.05 90 top
R39  150k  [R0603]  15.72,106.05 270 top
R40  125k  [R0603]  25.72,104.78 270 top
R41  75k  [R0603]  27.94,104.78 90 top
R42  60k  [R0603]  16.19,99.38 90 top
R43  75k  [R0603]  136.21,185.74 0 top
R44  150k  [R0603]  125.09,172.66 225 top
R45  180k  [R0603]  131.74,164.21 225 top
R46  75k  [R0603]  132.84,163.12 45 top
R47  144k  [R0603]  167,106.05 90 top
R48  22k  [R0603]  120.71,167.61 45 top
R49  .066  [R0603]  10.48,100.97 180 top
R50  .066  [R0603]  32.86,101.28 180 top
R51  360k  [R0603]  148.27,76.52 270 top
R52  180k  [R0603]  155.57,76.52 90 top
R53  1K  [R0603]  69.85,8.89 90 top
R54  0.10  [R0603]  133.85,157.17 135 top
R55  1K  [R0603]  8.02,30.24 45 top
R56  1K  [R0603]  12.46,25.8 45 top
R57  1K  [R0603]  16.91,21.35 45 top
R58  1K  [R0603]  21.43,16.83 45 top
R59  1K  [R0603]  25.72,12.46 45 top
R60  1K  [R0603]  30.24,8.02 45 top
R61  .22  [R0603]  173.67,93.66 180 top
R62  47k  [R0603]  153.03,138.43 180 top
R63  47k  [R0603]  140.02,72.39 0 top
R64  .183  [R0603]  160.02,64.14 180 top
R65  47k  [R0603]  140.02,69.53 0 top
R66  0.10  [R0603]  65.31,155.96 45 top
R67  0.10  [R0603]  92.39,157.16 45 top
R68  150k  [R0603]  15.72,128.91 270 top
R69  125k  [R0603]  26.35,127.64 270 top
R70  75k  [R0603]  27.94,127.64 90 top
R71  60k  [R0603]  16.19,122.24 90 top
R72  .132  [R0603]  10.48,123.83 180 top
R73  .132  [R0603]  32.86,124.14 180 top
R74  150k  [R0603]  24.76,182.18 225 top
R75  125k  [R0603]  30.94,174.21 225 top
R76  0.10  [R0603]  122.97,157.26 45 top
R77  120  [M1206]  133.03,19.05 90 top
R78  .263  [R0603]  47.31,185.1 270 top
R79  .183  [R0603]  145.41,67.63 180 top
R80  .22  [R0603]  166.05,97.47 0 top
R81  .31  [R0603]  133.03,34.92 270 top
R82  .11  [R0603]  11.75,148.27 180 top
R83  .174  [R0603]  166.05,67.63 270 top
R84  .786  [R0603]  31.75,16.83 270 top
R85  .11  [R0603]  127.64,192.72 270 top
R86  47k  [R0603]  55.24,107.63 270 top
R87  47k  [R0603]  58.42,117.79 0 top
R88  100k  [R0603]  195.58,31.75 180 top
R89  1K  [R0603]  34.29,8.89 90 top
R90  1K  [R0603]  8.26,33.66 0 top
R91  1k  [R0603]  173.67,38.42 90 top
R92  100k  [R0603]  181.61,173.67 0 top
R93  100k  [R0603]  181.61,171.61 0 top
R94  100k  [R0603]  181.61,163.83 180 top
R95  100k  [R0603]  196.85,161.61 180 top
R96  100k  [R0603]  186.06,185.42 0 top
R97  75k  [R0603]  32.51,172.64 45 top
R98  .033  [R0603]  32.86,55.56 180 top
R99  47k  [R0603]  108.27,35.56 0 top
R100  47k  [R0603]  128.27,22.86 180 top
R101  47k  [R0603]  109.38,30.48 0 top
R102  47k  [R0603]  107.63,32.07 180 top
R103  360k  [R0603]  161.93,106.05 270 top
R104  75k  [R0603]  169.23,106.05 90 top
R105  144k  [R0603]  129.54,46.2 90 top
R106  .31  [R0603]  124.78,31.75 0 top
R107  360k  [R0603]  124.46,46.2 270 top
R108  75k  [R0603]  131.76,46.2 90 top
R109  144k  [R0603]  23.5,154.31 90 top
R110  .11  [R0603]  30.16,141.92 180 top
R111  60k  [R0603]  20.38,177.13 45 top
R112  .066  [R0603]  17.47,182.3 135 top
R113  .066  [R0603]  33.52,166.69 135 top
R114  360k  [R0603]  18.41,154.31 270 top
R115  75k  [R0603]  25.72,154.31 90 top
R116  144k  [R0603]  173.35,76.52 90 top
R117  .174  [R0603]  180.02,64.14 180 top
R118  360k  [R0603]  168.28,76.52 270 top
R119  75k  [R0603]  175.58,76.52 90 top
R120  144k  [R0603]  37.47,24.92 90 top
R121  .786  [R0603]  27.94,19.53 90 top
R122  360k  [R0603]  32.38,24.92 270 top
R123  75k  [R0603]  39.69,24.92 90 top
R124  47k  [R0603]  112.08,20.64 90 top
R125  47k  [R0603]  124.78,36.83 0 top
R126  100k  [R0603]  181.61,165.74 180 top
R127  47k  [R0603]  71.12,21.91 90 top
R128  47k  [R0603]  68.9,22.86 90 top
R129  22  [R0603]  131.13,19.05 270 top
RESET_SW  B3SN-3012P  [SWITCH(B3SN)]  146.37,136.53 180 top
S1  CT2194MST  [SMS-004]  161.29,176.21 180 top
SW1  B3SN-3012P  [SWITCH(B3SN)]  48.26,3.81 0 top
SW2  B3SN-3012P  [SWITCH(B3SN)]  60.96,3.81 0 top
SW3  B3SN-3012P  [SWITCH(B3SN)]  73.66,3.81 0 top
U1  STM32F205VG  [PZ100]  111.76,101.6 45 top
U2  MCP601R  [SOT23-5]  55.56,190.82 90 top
U3  TPS62240DDC  [SOT23-5']  148.59,72.71 0 top
U4  MAX4376  [SOT23-5']  60.01,185.1 180 top
U5  TPS62240DDC  [SOT23-5']  48.58,190.5 0 top
U6  MCP601R  [SOT23-5]  130.49,185.74 0 top
U7  MAX4376  [SOT23-5']  124.78,181.29 90 top
U8  TPS62240DDC  [SOT23-5']  132.08,192.72 270 top
U9  MCP601R  [SOT23-5]  169.23,102.55 90 top
U10  MAX4376  [SOT23-5']  173.67,96.84 180 top
U11  MCP601R  [SOT23-5]  63.87,161.1 45 top
U12  Molex 500873-0816  [MICROSD]  120.65,8.89 180 top
U13  MAX4376  [SOT23-5']  160.02,67.31 180 top
U14  MAX4376  [SOT23-5']  77.67,159.41 135 top
U15  LM2623  [MSOP8]  69.93,167.16 45 top
U16  MCP601R  [SOT23-5]  93.08,161.1 45 top
U17  MCP601R  [SOT23-5]  21.91,73.03 90 top
U18  MAX4376  [SOT23-5']  10.48,74.93 0 top
U19  MAX4376  [SOT23-5']  10.48,52.07 0 top
U20  MAX4376  [SOT23-5']  32.86,81.6 180 top
U21  TPS62240DDC  [SOT23-5']  162.24,102.23 0 top
U22  LM2623  [MSOP8]  21.91,81.6 90 top
U23  MCP601R  [SOT23-5]  21.91,95.89 90 top
U24  MAX4376  [SOT23-5']  10.48,97.79 0 top
U25  MCP601R  [SOT23-5]  131.76,42.7 90 top
U26  MAX4376  [SOT23-5']  136.21,36.99 180 top
U27  MAX4376  [SOT23-5']  32.86,104.46 180 top
U28  LM2623  [MSOP8]  21.91,104.46 90 top
U29  MCP601R  [SOT23-5]  21.91,118.75 90 top
U30  MAX4376  [SOT23-5']  10.48,120.65 0 top
U31  MAX4376  [SOT23-5']  32.86,127.32 180 top
U32  LM2623  [MSOP8]  21.91,127.32 90 top
U33  MCP601R  [SOT23-5]  21.96,170.62 45 top
U34  MAX4376  [SOT23-5']  15.22,180.05 315 top
U35  MAX4376  [SOT23-5']  32.86,58.74 180 top
U36  MAX4376  [SOT23-5']  67.4,153.76 45 top
U37  MAX4376  [SOT23-5']  106.88,159.41 135 top
U38  LM2623  [MSOP8]  99.14,167.16 45 top
U39  MCP601R  [SOT23-5]  122.29,161.1 45 top
U40  LM2623  [MSOP8]  21.91,58.74 90 top
U41  MAX4376  [SOT23-5']  35.76,168.94 135 top
U42  LM2623  [MSOP8]  28.02,176.68 45 top
U43  TPS62240DDC  [SOT23-5']  124.78,42.39 0 top
U44  MCP601R  [SOT23-5]  25.72,150.81 90 top
U45  MCP601R  [SOT23-5]  21.91,50.16 90 top
U46  MAX4376  [SOT23-5']  30.16,145.1 180 top
U47  TPS62240DDC  [SOT23-5']  18.73,150.5 0 top
U48  MCP601R  [SOT23-5]  175.58,73.03 90 top
U49  MAX4376  [SOT23-5']  180.02,67.31 180 top
U50  MCP601R  [SOT23-5]  155.57,73.03 90 top
U51  TPS62240DDC  [SOT23-5']  168.59,72.71 0 top
U52  MCP601R  [SOT23-5]  39.69,21.43 90 top
U53  MAX4376  [SOT23-5']  44.13,15.72 180 top
U54  TPS62240DDC  [SOT23-5']  32.7,21.11 0 top
U55  MAX4376  [SOT23-5']  94.43,155.26 45 top
U56  MAX4376  [SOT23-5']  136.09,159.41 135 top
U57  LM2623  [MSOP8]  128.35,167.16 45 top
U58  HIH6130  [SO-08M]  118.43,34.92 270 top
U59  25AA512  [SO-08M]  118.43,22.23 270 top
U60  25AA512  [SO-08M]  118.43,28.57 270 top
U61  IS61WV51216-10ZSXI  [TSOPII-Z44]  146.37,101.6 0 top
U62  74HC4067  [SO24W]  60.64,62.87 90 top
U63  74HC4067  [SO24W]  60.64,97.16 90 top
U64  74HC4067  [SO24W]  60.64,80.01 90 top
U65  MAX6520  [SOT23]  102.55,12.06 180 top
U66  74HC259  [SO16]  60.64,111.76 90 top
U67  MCP601R  [SOT23-5]  95.57,12.38 180 top
U68  ADM3491ARZ  [SO14]  168.62,18.12 225 top
U69  MAX3232E  [SO16L]  177.8,118.75 90 top
U70  MAX4376  [SOT23-5']  125.06,155.16 45 top
U71  USB6B1  [SO08]  140.34,14.61 0 top
U72  74HC259  [SO16]  60.64,19.05 270 top
U73  74HC4067  [SO24W]  60.64,45.72 90 top
U74  MAX4376  [SOT23-5']  44.45,185.1 270 top
U75  MAX4376  [SOT23-5']  166.05,94.61 0 top
U76  MAX4376  [SOT23-5']  130.18,34.92 270 top
U77  MAX4376  [SOT23-5']  11.75,146.05 270 top
U78  MAX4376  [SOT23-5']  168.59,66.99 0 top
U79  MAX4376  [SOT23-5']  38.73,28.89 180 top
U80  MAX4376  [SOT23-5']  124.46,192.72 270 top
U81  RN42XV  [RN42XV]  189.23,166.37 0 top
U82  MAX4376  [SOT23-5']  148.59,66.36 0 top
U$1  [4,1]  151.76,22.86 0 top
U$2  [4,1]  161.61,154.31 0 top
U$3  [4,1]  55.88,154.31 0 top
U$4  [4,1]  21.59,31.75 0 top
U$25  XBEE802.15.4  [XBEE]  189.23,35.56 180 top
Y1  [HC49UP]  100.33,90.7 135 top

## Library data of the parts
C1-C85 C90-C93 C95-C99 C101-C103 C105-C112 C114 C115 C121 C122 C127-C169 R1-R129 = rcl
D1-D5 D13-D23 D51-D65 D68-D70 = diode
D6-D12 D30-D35 D42 L1-L4 L8-L13 L17-L22 U1 U3-U5 U7 U8 U10 U12-U14 U18-U21 U24 U26 U27 U30 U31 U34-U37 U41 U43 U46 U47 U49 U51 U53-U56 U58-U64 U70 U73-U82 U$25 = IKE
F1 RESET_SW SW1-SW3 = smd-ipc
J1-J4 J6 J7 J11 = jumper
J5 J13 J18-J20 J22-J32 = con-phoenix-254; OC_FARNELL: unknown; OC_NEWARK: unknown
J12 = IKE; OC_FARNELL: unknown; OC_NEWARK: unknown
J17 = con-lsta; OC_FARNELL: unknown; OC_NEWARK: unknown
J21 = con-thomas-betts; OC_FARNELL: unknown; OC_NEWARK: unknown
J41 = con-leotronics; OC_FARNELL: unknown; OC_NEWARK: unknown
K1 = IKE; MF: OMRON COMPONENTS USA; MPN: G6KU-2P-Y DC5; OC_FARNELL: unknown; OC_NEWARK: 35K4536
K2 = IKE; MF: OMRON COMPONENTS USA; MPN: G6KU-2F-Y DC3; OC_FARNELL: unknown; OC_NEWARK: 89C6496
K3 = IKE; MF: OMRON COMPONENTS USA; MPN: G6K-2P DC3; OC_FARNELL: 3937276; OC_NEWARK: 89C6482
K4 = IKE; MF: OMRON COMPONENTS USA; MPN: G6K-2G DC12; OC_FARNELL: 4601695; OC_NEWARK: 93B9118
LED1-LED10 = led
PAD1-PAD24 = wirepad
Q1 Q3-Q5 = zetex; MPN: DSS4160U-7; OC_FARNELL: 1710696; OC_NEWARK: 25R4558
S1 = smd-special
U2 U6 U9 U11 U16 U17 U23 U25 U29 U33 U39 U44 U45 U48 U50 U52 U67 = linear
U15 U22 U28 U32 U38 U40 U42 U57 U66 U72 = PEGMA
U65 = maxim; MF: MAXIM; MPN: MAX6520EUR-T; OC_FARNELL: unknown; OC_NEWARK: 02J4586
U68 = maxim; MF: MAXIM; MPN: MAX489CSD; OC_FARNELL: 9724559; OC_NEWARK: 34C3923
U69 = maxim; MF: MAXIM; MPN: MAX232ECWE+; OC_FARNELL: 9724435; OC_NEWARK: 67K4440
U71 = st-microelectronics; MPN: USB6B1; OC_FARNELL: 9804358; OC_NEWARK: 26M4750
U$1-U$4 = holes
Y1 = crystal; OC_FARNELL: unknown; OC_NEWARK: unknown

## Nets
485_DE: U1.66 U68.4
!LED4: LED4.C U72.4
!LED5: LED5.C U72.5
!LED6: LED6.C U72.6
!LED7: LED7.C U72.7
!LED8: LED8.C U72.9
!LED9: LED9.C U72.10
!LED10: LED3.C U72.11
!LED11: LED10.C U72.12
!SW1: R13.1 SW1.3 SW1.4 U1.7
!SW2: R29.1 SW2.3 SW2.4 U1.8
!SW3: R53.1 SW3.3 SW3.4 U1.9
/RESET_MCU: J41.10 R62.2 RESET_SW.1 RESET_SW.2 U1.14
A16: U1.58 U61.43
A17: U1.59 U61.44
A18: U1.60 U61.28
ADC123_IN1: U1.24 U73.1
ADC123_IN2: U1.25 U64.1
ADC123_IN3: U1.26 U63.1
B0IN: D3.A R22.2 U19.5
B0INRAW: J13.2 R22.1 U19.4 U73.23
B0LVEN: D2.C D13.C D16.C D19.C D53.C D58.C D63.C D68.C R11.1 R20.1 R23.1 R28.1 R42.1 R48.1 R71.1 R111.1 U11.4 U16.4 U17.4 U23.4 U29.4 U33.4 U39.4 U45.4
B0OUT: J3.1 R98.1 U35.5
B0OUTRAW: C12.1 C67.1 D5.C D55.C R98.2 U35.4
B1IN: D51.A R24.2 U18.5
B1INRAW: J5.2 R24.1 U18.4 U73.22
B1OUT: J2.1 R25.1 U20.5
B1OUTRAW: R25.2 U20.4
B2IN: D56.A R49.2 U24.5
B2INRAW: J18.2 R49.1 U24.4 U73.21
B2OUT: J4.1 R50.1 U27.5
B2OUTRAW: C68.1 D60.C R50.2 U27.4
B3IN: D61.A R72.2 U30.5
B3INRAW: J19.2 R72.1 U30.4 U73.20
B3OUT: J6.1 R73.1 U31.5
B3OUTRAW: C111.1 D65.C R73.2 U31.4
B4IN: C115.2 L12.1 R74.2 R112.2 U34.5
B4INRAW: J17.5 J17.6 J17.7 J17.8 R8.2 R112.1 U34.4 U73.19
B4OUT: J7.1 R113.1 U41.5
B4OUTRAW: C149.1 D70.C R113.2 U41.4
B5INRAW: C13.2 L2.1 R6.2 R66.1 U36.5
B5OUT: D30.A R14.1 U14.5 U73.18
B5OUTRAW: C25.1 D15.C R14.2 U14.4
B6INRAW: C27.2 L3.1 R15.2 R67.1 U55.5
B6OUT: D34.A R30.1 U37.5 U73.17
B6OUTRAW: C49.1 D18.C R30.2 U37.4
B7INRAW: C51.2 L4.1 R44.2 R76.1 U70.5
B7OUT: D35.A R54.1 U56.5 U73.16
B7OUTRAW: C56.1 D21.C R54.2 U56.4
BOOST4EN: U1.32 U32.2
BOOST5EN: U1.67 U15.2
BOOST6EN: U38.2 U66.4
BOOST7EN: U57.2 U66.5
BOOSTADJ0: C32.1 U45.3 U62.23
BOOSTADJ1: C9.1 U17.3 U62.22
BOOSTADJ2: C30.1 U23.3 U62.21
BOOSTADJ3: C72.1 U29.3 U62.20
BOOSTADJ4: C129.1 U33.3 U62.19
BOOSTADJ5: C22.1 U11.3 U62.18
BOOSTADJ6: C42.1 U16.3 U62.17
BOOSTADJ7: C53.1 U39.3 U62.16
BOOSTINCUR0: U19.1 U64.23
BOOSTINCUR1: U18.1 U64.22
BOOSTINCUR2: U24.1 U64.21
BOOSTINCUR3: U30.1 U64.20
BOOSTINCUR4: U34.1 U64.19
BOOSTINCUR5: U36.1 U64.18
BOOSTINCUR6: U55.1 U64.17
BOOSTINCUR7: U64.16 U70.1
BOOSTOUTCUR0: U35.1 U63.23
BOOSTOUTCUR1: U20.1 U63.22
BOOSTOUTCUR2: U27.1 U63.21
BOOSTOUTCUR3: U31.1 U63.20
BOOSTOUTCUR4: U41.1 U63.19
BOOSTOUTCUR5: U14.1 U63.18
BOOSTOUTCUR6: U37.1 U63.17
BOOSTOUTCUR7: U56.1 U63.16
BT_CTSRTS: U81.12 U81.16
BT_FRST: PAD5.1 U81.8
BT_RST: U1.36 U81.5
BUCKADJ0: C58.1 U50.3 U62.9
BUCKADJ1: C130.1 U2.3 U62.8
BUCKADJ2: C138.1 U9.3 U62.7
BUCKADJ3: C144.1 U25.3 U62.6
BUCKADJ4: C153.1 U44.3 U62.5
BUCKADJ5: C159.1 U48.3 U62.4
BUCKADJ6: C165.1 U52.3 U62.3
BUCKADJ7: C20.1 U6.3 U62.2
BUCKINCUR0: U64.9 U82.1
BUCKINCUR1: U64.8 U74.1
BUCKINCUR2: U64.7 U75.1
BUCKINCUR3: U64.6 U76.1
BUCKINCUR4: U64.5 U77.1
BUCKINCUR5: U64.4 U78.1
BUCKINCUR6: U64.3 U79.1
BUCKINCUR7: U64.2 U80.1
BUCKOUTCUR0: U13.1 U63.9
BUCKOUTCUR1: U4.1 U63.8
BUCKOUTCUR2: U10.1 U63.7
BUCKOUTCUR3: U26.1 U63.6
BUCKOUTCUR4: U46.1 U63.5
BUCKOUTCUR5: U49.1 U63.4
BUCKOUTCUR6: U53.1 U63.3
BUCKOUTCUR7: U7.1 U63.2
BUSVOUT: J2.2 J3.2 J4.2 J6.2 J7.2 J11.2 R66.2 R67.2 R76.2 R78.2 R79.2 R80.2 R81.2 R82.2 R83.2 R84.2 R85.2 S1.5 S1.6 S1.7 S1.8 U1.23 U3.3 U36.4 U55.4 U70.4 U74.4 U75.4 U76.4 U77.4 U78.4 U79.4 U80.4 U82.4
D0: U1.61 U61.1 U61.7
D1: U1.62 U61.2 U61.8
D2: U1.81 U61.3 U61.9
D3: U1.82 U61.4 U61.10
D4: U1.38 U61.5 U61.13
D5: U1.39 U61.14 U61.18
D6: U1.40 U61.15 U61.19
D7: U1.41 U61.16 U61.20
D8: U1.42 U61.21 U61.29
D9: U1.43 U61.22 U61.30
D10: U1.44 U61.23 U61.31
D11: U1.45 U61.24 U61.32
D12: U1.46 U61.25 U61.35
D13: U1.55 U61.26 U61.36
D14: U1.56 U61.27 U61.37
D15: U1.57 U61.38 U61.42
DACOUT1: U1.29 U62.1
DACOUT2: U1.30 U67.3
DOMEN: U1.15 U62.15 U66.13 U72.13
DOMLEN: R87.1 R127.1 U1.1 U66.14 U72.14
DOMRST: R86.1 R128.2 U1.34 U66.15 U72.15
DOMSEL0: U1.18 U62.10 U63.10 U64.10 U66.1 U72.1 U73.10
DOMSEL1: U1.16 U62.11 U63.11 U64.11 U66.2 U72.2 U73.11
DOMSEL2: U1.17 U62.14 U63.14 U64.14 U66.3 U72.3 U73.14
DOMSEL3: U1.33 U62.13 U63.13 U64.13 U73.13
EE0CS: R101.2 U1.91 U60.1
EE1CS: R102.2 U1.95 U59.1
EEHLD: R100.2 U1.37 U59.7 U60.7
EXTVREF: U1.31 U65.2
FSMC_BLN0: U1.97 U61.40
FSMC_BLN1: U1.98 U61.39
FSMC_NE1: U1.88 U61.6
FSMC_NOE: U1.85 U61.41
FSMC_NWE: U1.86 U61.17
HIHALM: R125.2 U1.84 U58.6
HIHCS: R99.2 U1.96 U58.3
JTCK: J41.4 U1.76
JTDI: J41.8 U1.77
JTDO: J41.6 U1.89
JTMS: J41.2 U1.72
K1EN: Q1.2 U1.5
K2EN: Q3.2 U1.4
K3EN: Q4.2 U1.3
K4EN: Q5.2 U1.2
MCUSCK: R65.1 U1.52 U12.5 U58.4 U59.6 U60.6
MCUSDI: R34.1 U1.54 U12.7 U58.5 U59.2 U60.2
MCUSDO: R63.1 U1.53 U12.3 U59.5 U60.5
MCUUSBD+: R32.1 U1.71
MCUUSBD-: R31.1 U1.70
N$1: C131.1 R78.1 U5.1 U74.5
N$2: C8.2 D1.C D3.C L10.1 R36.2
N$3: J22.1 U69.7
N$4: PAD3.1 R20.2 R37.1 R38.2 U40.4
N$5: C4.1 R36.1 U40.3
N$6: C2.2 D51.C D52.C L8.1 R5.2
N$7: J22.2 U69.8
N$8: C4.2 D4.A L10.2 U40.8
N$10: D42.C R4.1 U50.4
N$11: PAD16.1 R7.1 R10.2 R11.2 U15.4
N$12: PAD2.1 R17.1 R18.2 R23.2 U22.4
N$13: C1.1 R5.1 U22.3
N$14: R126.2 U81.6
N$15: C1.2 D54.A L8.2 U22.8
N$16: C6.1 R6.1 U15.3
N$17: C6.2 D14.A L2.2 U15.8
N$18: L13.1 U3.5
N$19: D7.C R2.1 U6.4
N$20: D4.C D5.A R37.2 U40.2 U40.6 U40.7
N$21: D14.C D15.A R7.2 U15.6 U15.7
N$22: D13.A U11.1
N$23: R94.2 U81.7
N$24: R95.1 U81.13
N$25: PAD17.1 R19.1 R27.2 R28.2 U38.4
N$26: J1.2 J21.5
N$27: C48.1 R79.1 U3.1 U82.5
N$28: D54.C D55.A R17.2 U22.2 U22.6 U22.7
N$29: D53.A U17.1
N$30: C33.1 U69.2
N$31: C17.2 U1.12 Y1.2
N$32: C45.1 U1.13 Y1.1
N$33: D2.A U45.1
N$34: C136.2 PAD7.1 R2.2 R9.1 R43.2 U8.4
N$35: L1.1 U8.5
N$36: D31.A K2.8 Q3.1
N$37: C139.1 R80.1 U21.1 U75.5
N$38: C26.1 R15.1 U38.3
N$39: C26.2 D17.A L3.2 U38.8
N$40: D6.C R1.1 U2.4
N$41: D17.C D18.A R19.2 U38.6 U38.7
N$42: D16.A U16.1
N$43: D7.A U6.1
N$44: C28.2 D56.C D57.C L9.1 R39.2
N$45: PAD19.1 R45.1 R46.2 R48.2 U57.4
N$46: C50.1 R44.1 U57.3
N$47: PAD4.1 R40.1 R41.2 R42.2 U28.4
N$48: C35.1 U69.6
N$49: C36.1 U69.1
N$50: C36.2 U69.3
N$51: C37.1 U69.4
N$52: C16.1 R39.1 U28.3
N$53: C16.2 D59.A L9.2 U28.8
N$54: C37.2 U69.5
N$55: J21.3 U69.14
N$56: J21.2 U69.13
N$57: D59.C D60.A R40.2 U28.2 U28.6 U28.7
N$58: J1.3 R21.2
N$59: D22.A K1.8 Q1.1
N$60: C134.2 PAD1.1 R1.2 R16.1 R35.2 U5.4
N$61: C50.2 D20.A L4.2 U57.8
N$62: D20.C D21.A R45.2 U57.6 U57.7
N$63: D19.A U39.1
N$64: LED3.A R89.1
N$65: C145.1 R81.1 U43.1 U76.5
N$66: D58.A U23.1
N$67: C154.1 R82.1 U47.1 U77.5
N$68: C160.1 R83.1 U51.1 U78.5
N$69: C128.2 PAD18.1 R4.2 R51.1 R52.2 U3.4
N$70: C166.1 R84.1 U54.1 U79.5
N$71: C21.1 R85.1 U8.1 U80.5
N$72: C83.+ S1.3
N$73: C90.+ S1.1
N$74: C81.+ S1.2
N$75: LED4.A R55.1
N$76: LED5.A R56.1
N$77: LED6.A R57.1
N$78: LED10.A R90.1
N$79: C84.+ S1.4
N$80: J12.4 R129.2
N$83: C70.2 D61.C D62.C L11.1 R68.2
N$87: LED7.A R58.1
N$88: LED8.A R59.1
N$89: LED9.A R60.1
N$90: R69.1 R70.2 R71.2 U32.4
N$94: C69.1 R68.1 U32.3
N$96: C69.2 D64.A L11.2 U32.8
N$97: D64.C D65.A R69.2 U32.6 U32.7
N$98: D63.A U29.1
N$99: L17.1 U5.5
N$100: D6.A U2.1
N$101: PAD6.1 R75.1 R97.2 R111.2 U42.4
N$102: J20.1 U67.1 U67.4
N$103: C114.1 R74.1 U42.3
N$104: C114.2 D69.A L12.2 U42.8
N$106: D69.C D70.A R75.2 U42.2 U42.6 U42.7
N$114: J32.1 K1.3
N$115: D68.A U33.1
N$118: J32.2 K1.6
N$119: D32.A K3.8 Q4.1
N$120: J28.1 K3.3
N$121: D23.C J31.1 K1.4
N$122: J28.2 K3.6
N$123: D33.A K4.8 Q5.1
N$126: J30.1 K2.3
N$128: D30.C J29.1 K2.4
N$130: J30.2 K2.6
N$131: R91.1 U$25.15
N$133: LED2.A R91.2
N$135: D34.C J27.1 K3.4
N$136: R96.1 U81.15
N$138: D35.C J25.1 K4.4
N$141: J26.1 K4.3
N$142: J26.2 K4.6
N$152: D8.C R47.1 U9.4
N$153: J24.1 U68.12
N$154: J24.2 U68.11
N$155: J23.1 U68.10
N$156: J23.2 U68.9
N$169: J12.1 U71.1
N$170: J12.2 U71.2
N$171: J12.3 U71.3
N$172: J12.5 U71.4
N$173: C142.2 PAD8.1 R47.2 R103.1 R104.2 U21.4
N$174: L18.1 U21.5
N$175: D8.A U9.1
N$176: D42.A U50.1
N$187: D9.C R105.1 U25.4
N$188: C151.2 PAD9.1 R105.2 R107.1 R108.2 U43.4
N$189: L19.1 U43.5
N$190: D9.A U25.1
N$192: D10.C R109.1 U44.4
N$193: C157.2 PAD10.1 R109.2 R114.1 R115.2 U47.4
N$194: L20.1 U47.5
N$195: D10.A U44.1
N$197: D11.C R116.1 U48.4
N$198: C163.2 PAD11.1 R116.2 R118.1 R119.2 U51.4
N$199: L21.1 U51.5
N$200: D11.A U48.1
N$202: D12.C R120.1 U52.4
N$203: C169.2 PAD12.1 R120.2 R122.1 R123.2 U54.4
N$204: L22.1 U54.5
N$205: D12.A U52.1
PE: C2.1 C3.1 C5.1 C7.1 C8.1 C9.2 C10.1 C11.1 C12.2 C13.1 C14.1 C15.1 C17.1 C18.1 C19.2 C20.2 C21.2 C22.2 C23.1 C24.1 C25.2 C27.1 C28.1 C29.1 C30.2 C31.1 C32.2 C34.2 C35.2 C38.1 C39.2 C40.1 C41.1 C42.2 C43.1 C44.1 C45.2 C46.1 C47.1 C48.2 C49.2 C51.1 C52.1 C53.2 C54.1 C55.1 C56.2 C57.2 C58.2 C59.1 C60.1 C61.1 C62.1 C63.1 C64.1 C65.1 C66.1 C67.2 C68.2 C70.1 C71.1 C72.2 C73.1 C74.1 C75.1 C76.1 C77.1 C78.1 C79.1 C80.1 C81.- C82.1 C83.- C84.- C85.1 C90.- C91.1 C92.2 C93.1 C95.1 C96.1 C97.1 C98.1 C99.1 C101.1 C102.1 C103.1 C105.1 C106.1 C107.1 C108.1 C109.1 C110.1 C111.2 C112.1 C115.1 C121.1 C122.1 C127.1 C129.2 C130.2 C131.2 C132.2 C133.1 C135.1 C137.1 C138.2 C139.2 C140.2 C141.1 C143.1 C144.2 C145.2 C146.2 C147.1 C148.1 C149.2 C150.1 C152.1 C153.2 C154.2 C155.2 C156.1 C158.1 C159.2 C160.2 C161.2 C162.1 C164.1 C165.2 C166.2 C167.2 C168.1 D1.A D52.A D57.A D62.A J5.1 J13.1 J17.1 J17.2 J17.3 J17.4 J18.1 J19.1 J20.2 J25.2 J27.2 J29.2 J31.2 J41.3 J41.5 J41.7 J41.9 K1.5 K2.5 K3.5 K4.5 LED1.C LED2.C Q1.3 Q3.3 Q4.3 Q5.3 R10.1 R18.1 R21.1 R27.1 R35.1 R38.1 R41.1 R43.1 R46.1 R52.1 R70.1 R86.2 R94.1 R95.2 R96.2 R97.1 R104.1 R108.1 R115.1 R119.1 R123.1 R126.1 R128.1 RESET_SW.3 RESET_SW.4 SW1.1 SW1.2 SW2.1 SW2.2 SW3.1 SW3.2 U1.10 U1.20 U1.27 U1.74 U1.94 U2.5 U3.2 U4.2 U5.2 U6.5 U7.2 U8.2 U9.5 U10.2 U11.5 U12.6 U13.2 U14.2 U15.1 U15.5 U16.5 U17.5 U18.2 U19.2 U20.2 U21.2 U22.1 U22.5 U23.5 U24.2 U25.5 U26.2 U27.2 U28.1 U28.5 U29.5 U30.2 U31.2 U32.1 U32.5 U33.5 U34.2 U35.2 U36.2 U37.2 U38.1 U38.5 U39.5 U40.1 U40.5 U41.2 U42.1 U42.5 U43.2 U44.5 U45.5 U46.2 U47.2 U48.5 U49.2 U50.5 U51.2 U52.5 U53.2 U54.2 U55.2 U56.2 U57.1 U57.5 U58.2 U59.3 U59.4 U60.3 U60.4 U61.12 U61.34 U62.12 U63.12 U63.15 U64.12 U64.15 U65.3 U66.8 U67.5 U68.6 U68.7 U69.15 U70.2 U71.5 U72.8 U73.12 U73.15 U74.2 U75.2 U76.2 U77.2 U78.2 U79.2 U80.2 U81.10 U82.2 U$25.10
RAWV0: C19.1 C128.1 L13.2 R51.2 R64.2 U13.4
RAWV1: C132.1 C134.1 L17.2 R12.2 R16.2 U4.4
RAWV2: C140.1 C142.1 L18.2 R61.2 R103.2 U10.4
RAWV3: R106.2 U26.4
RAWV4: R110.2 U46.4
RAWV5: C161.1 C163.1 L21.2 R117.2 R118.2 U49.4
RAWV6: C167.1 C169.1 L22.2 R121.2 R122.2 U53.4
RAWV7: C57.1 C136.1 L1.2 R3.2 R9.2 U7.4
SDCS: R124.2 U1.90 U12.2
UART1RX: U1.93 U68.2
UART1TX: U1.92 U68.5
UART3RX: R26.1 U1.48 U$25.2
UART3TX: R88.1 U1.47 U$25.3
UART4RX: R92.1 U1.79 U81.2
UART4TX: R93.1 U1.78 U81.3
UART5RX: U1.83 U69.12
UART5TX: U1.80 U69.11
UART6RX: U1.64 U69.9
UART6TX: U1.63 U69.10
USB5V_F: F1.P$1 J11.3 R77.1 R77.2 U1.68
USB_ID: R129.1 U1.51
USBD+: R32.2 U71.6
USBD-: R31.2 U71.7
USBLED: LED1.A R33.2 U1.69
V0: C101.2 C102.2 C103.2 C105.2 C106.2 C107.2 C108.2 C109.2 J41.1 PAD13.1 R62.1 R64.1 U1.6 U1.11 U1.19 U1.22 U1.28 U1.49 U1.50 U1.73 U1.75 U1.100 U13.5 U73.9
V1: C3.2 C5.2 C7.2 C10.2 C11.2 C14.2 C18.2 C24.2 C29.2 C31.2 C40.2 C41.2 C46.2 C47.2 C52.2 C54.2 C55.2 C62.2 C63.2 C64.2 C65.2 C66.2 C71.2 C73.2 C74.2 C75.2 C76.2 C77.2 C78.2 C79.2 C80.2 C82.2 C91.2 C93.2 C98.2 C110.2 C112.2 C121.2 C122.2 C127.2 C133.2 C135.2 C137.2 C141.2 C143.2 C147.2 C148.2 C150.2 C152.2 C156.2 C158.2 C162.2 C164.2 C168.2 PAD14.1 R12.1 R87.2 U2.2 U4.3 U4.5 U6.2 U7.3 U9.2 U10.3 U11.2 U13.3 U14.3 U16.2 U17.2 U18.3 U19.3 U20.3 U23.2 U24.3 U25.2 U26.3 U27.3 U29.2 U30.3 U31.3 U33.2 U34.3 U35.3 U36.3 U37.3 U39.2 U41.3 U44.2 U45.2 U46.3 U48.2 U49.3 U50.2 U52.2 U53.3 U55.3 U56.3 U62.24 U63.24 U64.24 U65.1 U66.16 U70.3 U73.8 U73.24 U74.3 U75.3 U76.3 U77.3 U78.3 U79.3 U80.3 U82.3
V1EN: U1.35 U5.3
V2: C60.2 C61.2 PAD15.1 R61.1 U10.5 U61.11 U61.33 U73.7
V2EN: U21.3 U66.6
V3: C15.2 C23.2 C43.2 C44.2 C59.2 C92.1 PAD20.1 R34.2 R63.2 R65.2 R99.1 R100.1 R101.1 R102.1 R106.1 R124.1 R125.1 U12.4 U26.5 U58.1 U58.8 U59.8 U60.8 U73.6
V3EN: U43.3 U66.7
V3RAW: C146.1 C151.1 L19.2 R107.2
V4: PAD21.1 R8.1 R110.1 U46.5 U73.5
V4EN: U47.3 U66.9
V4RAW: C155.1 C157.1 L20.2 R114.2
V5: C33.2 C34.1 C38.2 C39.1 C95.2 C96.2 C97.2 PAD22.1 R26.2 R33.1 R88.2 R92.2 R93.2 R117.1 U49.5 U68.13 U68.14 U69.16 U73.4 U81.1 U$25.1
V5EN: U51.3 U66.10
V6: C85.2 C99.2 PAD23.1 R13.2 R29.2 R53.2 R55.2 R56.2 R57.2 R58.2 R59.2 R60.2 R89.2 R90.2 R121.1 R127.2 U53.5 U67.2 U72.16 U73.3
V6EN: U54.3 U66.11
V7: D22.C D23.A D31.C D32.C D33.C K1.1 K2.1 K3.1 K4.1 PAD24.1 R3.1 U7.5 U73.2
V7EN: U8.3 U66.12
VUSB: F1.P$2 U71.8
XBE_RST: U1.87 U$25.5
~485_RE: U1.65 U68.3

## Tracks (layer width: path | path; a pad name or v marks a point on that pad's centre or on a via)
485_DE  (via drill 0.38)
  Top 0.254: U1.66 125.83,117.79 v127.95,117.79
  Top 0.406: v123.51,66.67 123.51,57.15 127.95,52.7 140.65,52.7 144.78,48.58 144.78,41.95 U68.4 | v125.41,91.12 v125.41,66.67
  Bottom 0.254: v127.95,117.79 127.95,107.63 125.41,105.09
  Bottom 0.406: 125.41,105.09 v125.41,91.12 | v125.41,66.67 v123.51,66.67
!LED4  (via drill 0.38)
  Top 0.406: U72.4 54.61,19.68 v53.34,18.41 | v6.99,25.4 3.24,25.4 LED4.C
  Bottom 0.406: v6.99,25.4 16.19,16.19 51.12,16.19 v53.34,18.41
!LED5  (via drill 0.38)
  Top 0.406: U72.5 v55.88,18.41 | v8.89,19.68 7.65,20.92 LED5.C
  Bottom 0.406: v55.88,18.41 51.75,14.29 15.24,14.29 9.84,19.68 v8.89,19.68
!LED6  (via drill 0.38)
  Top 0.406: U72.6 v55.88,17.14 | v15.24,13.34 12.1,16.48 LED6.C
  Bottom 0.406: v55.88,17.14 51.75,13.02 15.56,13.02 v15.24,13.34
!LED7  (via drill 0.38)
  Top 0.406: U72.7 v55.88,15.88 | v19.05,12.06 16.57,12.06 LED7.C
  Bottom 0.406: v55.88,15.88 52.07,12.06 v19.05,12.06
!LED8  (via drill 0.38)
  Top 0.406: U72.9 v65.41,14.61 | v22.54,6.03 20.99,7.59 LED8.C
  Bottom 0.406: v65.41,14.61 61.91,11.11 27.62,11.11 v22.54,6.03
!LED9  (via drill 0.38)
  Top 0.406: U72.10 v66.67,15.88 | v26.67,1.91 25.43,3.14 LED9.C
  Bottom 0.406: v66.67,15.88 66.67,14.61 62.23,10.16 37.78,10.16 29.53,1.91 v26.67,1.91
!LED10  (via drill 0.38)
  Top 0.406: U72.11 v67.63,17.14 | v36.2,2.22 36.03,2.06 LED3.C
  Bottom 0.406: v67.63,17.14 67.63,13.97 63.18,9.53 44.45,9.53 37.15,2.22 v36.2,2.22
!LED11  (via drill 0.38)
  Top 0.406: U72.12 v66.67,18.41 | LED10.C 1.91,33.5 1.91,28.89 v3.49,27.3
  Bottom 0.406: v66.67,18.41 65.41,19.68 55.88,19.68 51.44,15.24 15.56,15.24 v3.49,27.3
!SW1  (via drill 0.38)
  Top 0.254: U1.7 102.44,96.52 97.16,96.52
  Top 0.406: R13.1 44.45,5.71 45.12,5.71 SW1.4 SW1.3 51.44,5.79 v51.44,8.57 | 97.16,96.52 95.25,98.42 v84.45,98.42 | v84.45,85.72 v84.45,39.69
  Bottom 0.406: v51.44,8.57 66.67,8.57 71.12,13.02 84.45,26.35 v84.45,39.69 | v84.45,98.42 v84.45,85.72
!SW2  (via drill 0.38)
  Top 0.254: U1.8 102.19,95.57 v97.79,95.57
  Top 0.406: R29.1 57.15,5.71 57.81,5.71 SW2.4 SW2.3 63.82,5.81 v63.82,6.99 | v93.98,21.27 93.98,55.56 96.84,58.42 96.84,64.77 97.79,65.72 v97.79,86.36
  Bottom 0.406: v63.82,6.99 66.67,6.99 70.8,11.11 73.03,11.11 83.19,21.27 v93.98,21.27 | v97.79,86.36 v97.79,95.57
!SW3  (via drill 0.38)
  Top 0.254: U1.9 103.19,95.86 v103.19,95.25
  Top 0.406: SW3.3 SW3.4 70.52,5.71 69.85,5.71 | R53.1 69.85,5.71 | 69.85,5.71 76.83,5.71 77.15,6.03 v77.15,8.57 | v95.57,20.32 v95.57,37.78 | v107.31,37.78 107.31,56.83 100.97,63.18 100.97,82.87 v103.19,85.09
  Bottom 0.254: v103.19,95.25 v103.19,85.09
  Bottom 0.406: v95.57,37.78 v107.31,37.78 | v95.57,20.32 88.9,20.32 v77.15,8.57
/RESET_MCU  (via drill 0.38)
  Top 0.254: U1.14 104.78,93.91 104.78,92.39 105.41,91.76 105.41,88.27 107.31,86.36 107.31,84.14
  Top 0.406: RESET_SW.2 RESET_SW.1 149.5,138.43 R62.2 | v97.79,136.53 99.38,138.11 109.54,138.11 111.44,140.02 140.34,140.02 141.92,138.43 143.27,138.43 RESET_SW.2 | 142.77,138.11 143.15,138.5 RESET_SW.2 | v97.79,114.94 97.79,115.69 J41.10 | 107.31,84.14 102.23,79.06 v102.23,69.22 | v95.89,85.72 v95.89,69.22
  Bottom 0.406: v97.79,136.53 v97.79,114.94 97.79,104.78 95.89,102.87 v95.89,85.72 | v95.89,69.22 v102.23,69.22
A16  (via drill 0.38)
  Top 0.254: v138.75,111.44 125.14,111.44 U1.58 | v138.75,106.05 138.75,107.21 U61.43
  Bottom 0.254: v138.75,111.44 v138.75,106.05
A17  (via drill 0.38)
  Top 0.254: v137.79,112.24 125.22,112.24 U1.59
  Top 0.406: U61.44 137.97,108.25 v137.79,108.43
  Bottom 0.406: v137.79,108.43 v137.79,112.24
A18  (via drill 0.38)
  Top 0.254: v150.81,113.03 125.31,113.03 U1.60 | U61.28 150.77,109.02 v150.81,109.06
  Bottom 0.254: v150.81,113.03 v150.81,109.06
ADC123_IN1  (via drill 0.38)
  Top 0.254: U1.24 109.22,91.28 109.22,88.27 111.12,86.36 111.12,82.23
  Top 0.406: v110.17,38.73 110.17,62.23 107.95,64.45 107.95,79.06 111.12,82.23 | U73.1 v87.31,38.73
  Bottom 0.406: v110.17,38.73 v87.31,38.73
ADC123_IN2  (via drill 0.38)
  Top 0.254: U1.25 109.86,91.21 109.86,88.27 111.76,86.36 111.76,81.92
  Top 0.406: v108.9,73.03 108.9,79.06 111.76,81.92 | U64.1 v75.25,73.03
  Bottom 0.406: v75.25,73.03 v108.9,73.03
ADC123_IN3  (via drill 0.38)
  Top 0.254: U1.26 113.67,91.21 v113.67,84.14
  Top 0.406: v74.93,86.68 71.44,90.17 65.72,90.17 U63.1
  Bottom 0.406: v74.93,86.68 74.93,84.77 75.56,84.14 v113.67,84.14
B0IN
  Top 0.406: U19.5 | U19.5 9.53,52.7 10.16,52.07 13.51,52.07 D3.A | U19.5 9.53,55.14 R22.2
B0INRAW
  Top 0.406: U19.4 11.43,55.15 R22.1 11.33,55.98 10.79,56.52 J13.2 6.35,51.44 19.05,38.73 52.7,38.73 53.98,40.01 U73.23
B0LVEN  (via drill 0.38)
  Top 0.406: U45.4 19.37,51.12 18.73,51.75 D2.C | R20.1 18.69,52.81 D2.C | D2.C 18.73,53.66 17.78,54.61 v17.78,55.56 | U17.4 19.37,73.97 18.73,74.61 D53.C | R23.1 18.69,75.67 D53.C | D53.C 18.73,76.52 17.78,77.47 v17.78,78.42 | U23.4 19.37,96.83 18.73,97.47 D58.C | R42.1 18.69,98.53 D58.C | D58.C 18.73,99.38 17.78,100.33 v17.78,101.28 | U33.4 20.83,173.09 20.83,173.99 D68.C | 21.55,174.77 D68.C | D68.C 22.18,175.34 22.18,176.68 v22.85,177.36 | U29.4 19.37,119.69 18.73,120.33 D63.C | R71.1 18.69,121.39 D63.C | D63.C 18.73,122.24 17.78,123.19 v17.78,124.14 | U11.4 62.74,163.56 62.74,164.47 D13.C | D13.C 63.46,165.24 R11.1 | D13.C 64.09,165.81 64.09,167 v64.76,167.67 | U16.4 91.95,163.56 91.95,164.47 D16.C | 92.67,165.24 D16.C | D16.C 93.3,165.81 93.3,167.16 v93.97,167.83 | U39.4 121.16,163.56 121.16,164.47 D19.C 121.88,165.24 R48.1 114.42,172.7 v102.02,172.7 | v73.18,176.05 82.23,167.01 R28.1 92.67,165.24 | 92.67,165.24 D16.C | R111.1 19.84,176.53 D68.C | R11.1 61.59,167.01 60.96,167.64 51.12,167.64 50.48,168.28 v50.48,180.97 | R11.1
  Bottom 0.406: v50.48,180.97 26.47,180.97 v22.85,177.36 17.78,172.28 v17.78,124.14 17.78,110.81 18.1,110.49 18.1,107.95 17.78,107.63 v17.78,101.28 17.78,87.63 18.1,87.31 18.1,85.09 17.78,84.77 v17.78,78.42 17.78,64.77 18.1,64.45 18.1,62.55 17.78,62.23 v17.78,55.56 | v93.97,167.83 98.84,172.7 v102.02,172.7 | v73.18,176.05 64.8,167.67 v64.76,167.67
B0OUT
  Top 0.406: U35.5 33.81,55.66 R98.1 33.71,53.4 J3.1
B0OUTRAW  (via drill 0.38)
  Top 0.406: U35.4 31.91,55.66 R98.2 D5.C 29.99,51.97 C67.1 v28.26,51.75 | D55.C 29.99,74.83 C12.1 v28.26,74.61
  Bottom 0.406: v28.26,74.61 28.89,73.98 28.89,52.39 v28.26,51.75
B1IN
  Top 0.406: U18.5 | U18.5 9.53,75.56 10.16,74.93 13.51,74.93 D51.A | U18.5 9.53,78 R24.2
B1INRAW  (via drill 0.38)
  Top 0.406: U18.4 11.43,78 R24.1 11.33,78.84 10.79,79.38 J5.2 4.13,77.15 4.13,52.39 v16.51,40.01 | U73.22 53.66,41.27 52.39,40.01 v19.05,40.01
  Bottom 0.406: v19.05,40.01 v16.51,40.01
B1OUT
  Top 0.406: U20.5 33.81,78.52 R25.1 33.71,76.26 J2.1
B1OUTRAW